# Altium PCB верхняя плата версия 1.PcbDoc
Units mm, origin at the board's own origin, x right, y up, seen from the top; angles counter-clockwise.
Board outline 57.07 x 52.6 mm, 4 copper layers (Top Layer 1, Top Layer, Bottom Layer, Bottom Layer 1), stack 0.603 mm thick; 105 components, 130 nets, 774 pads, 174 vias.
Unrouted connection lines stored in the file: 275.
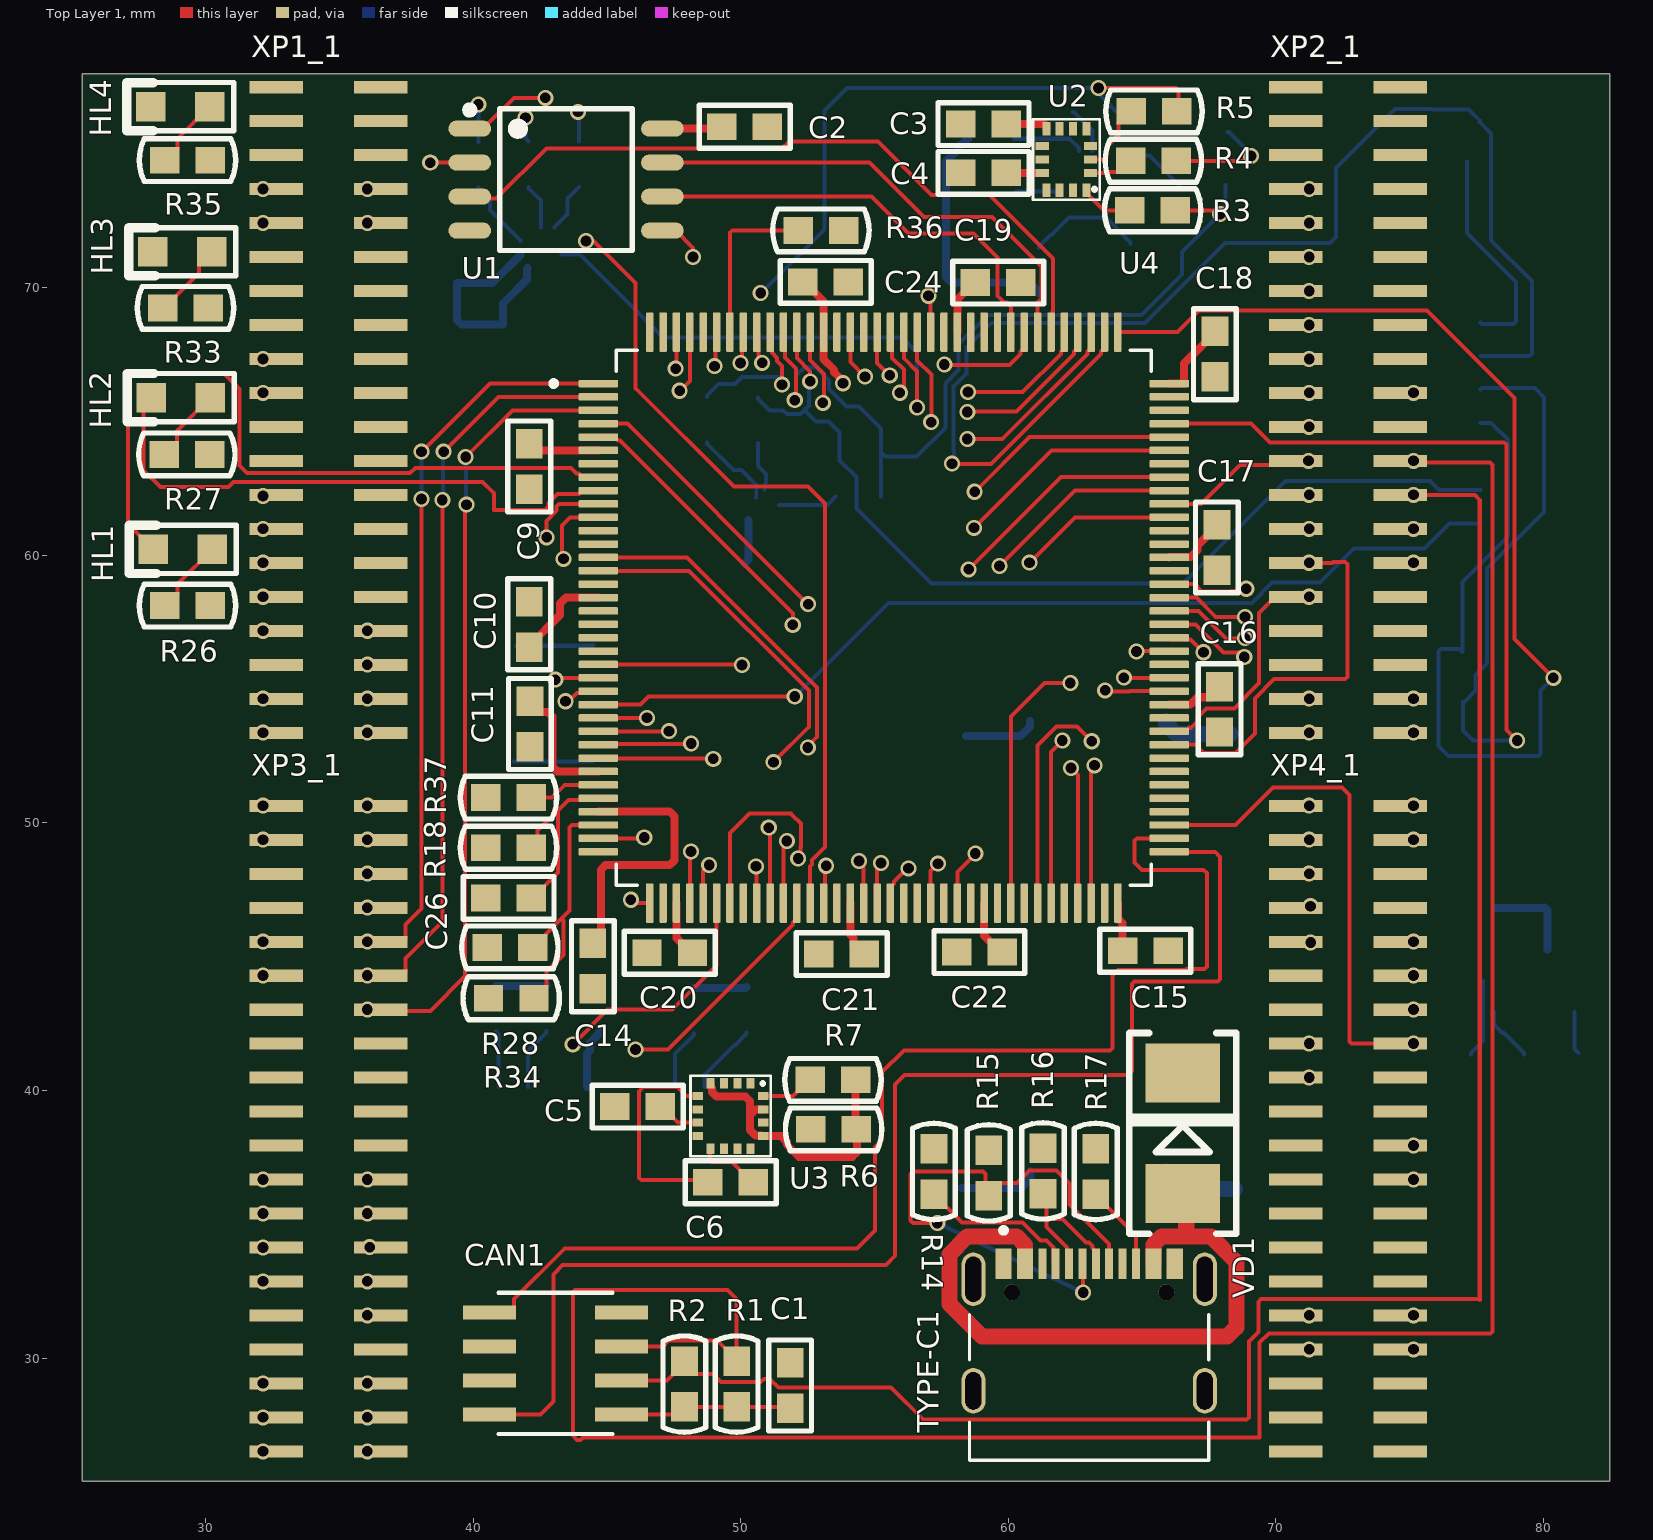
[diagram p0: Top Layer 1 view]
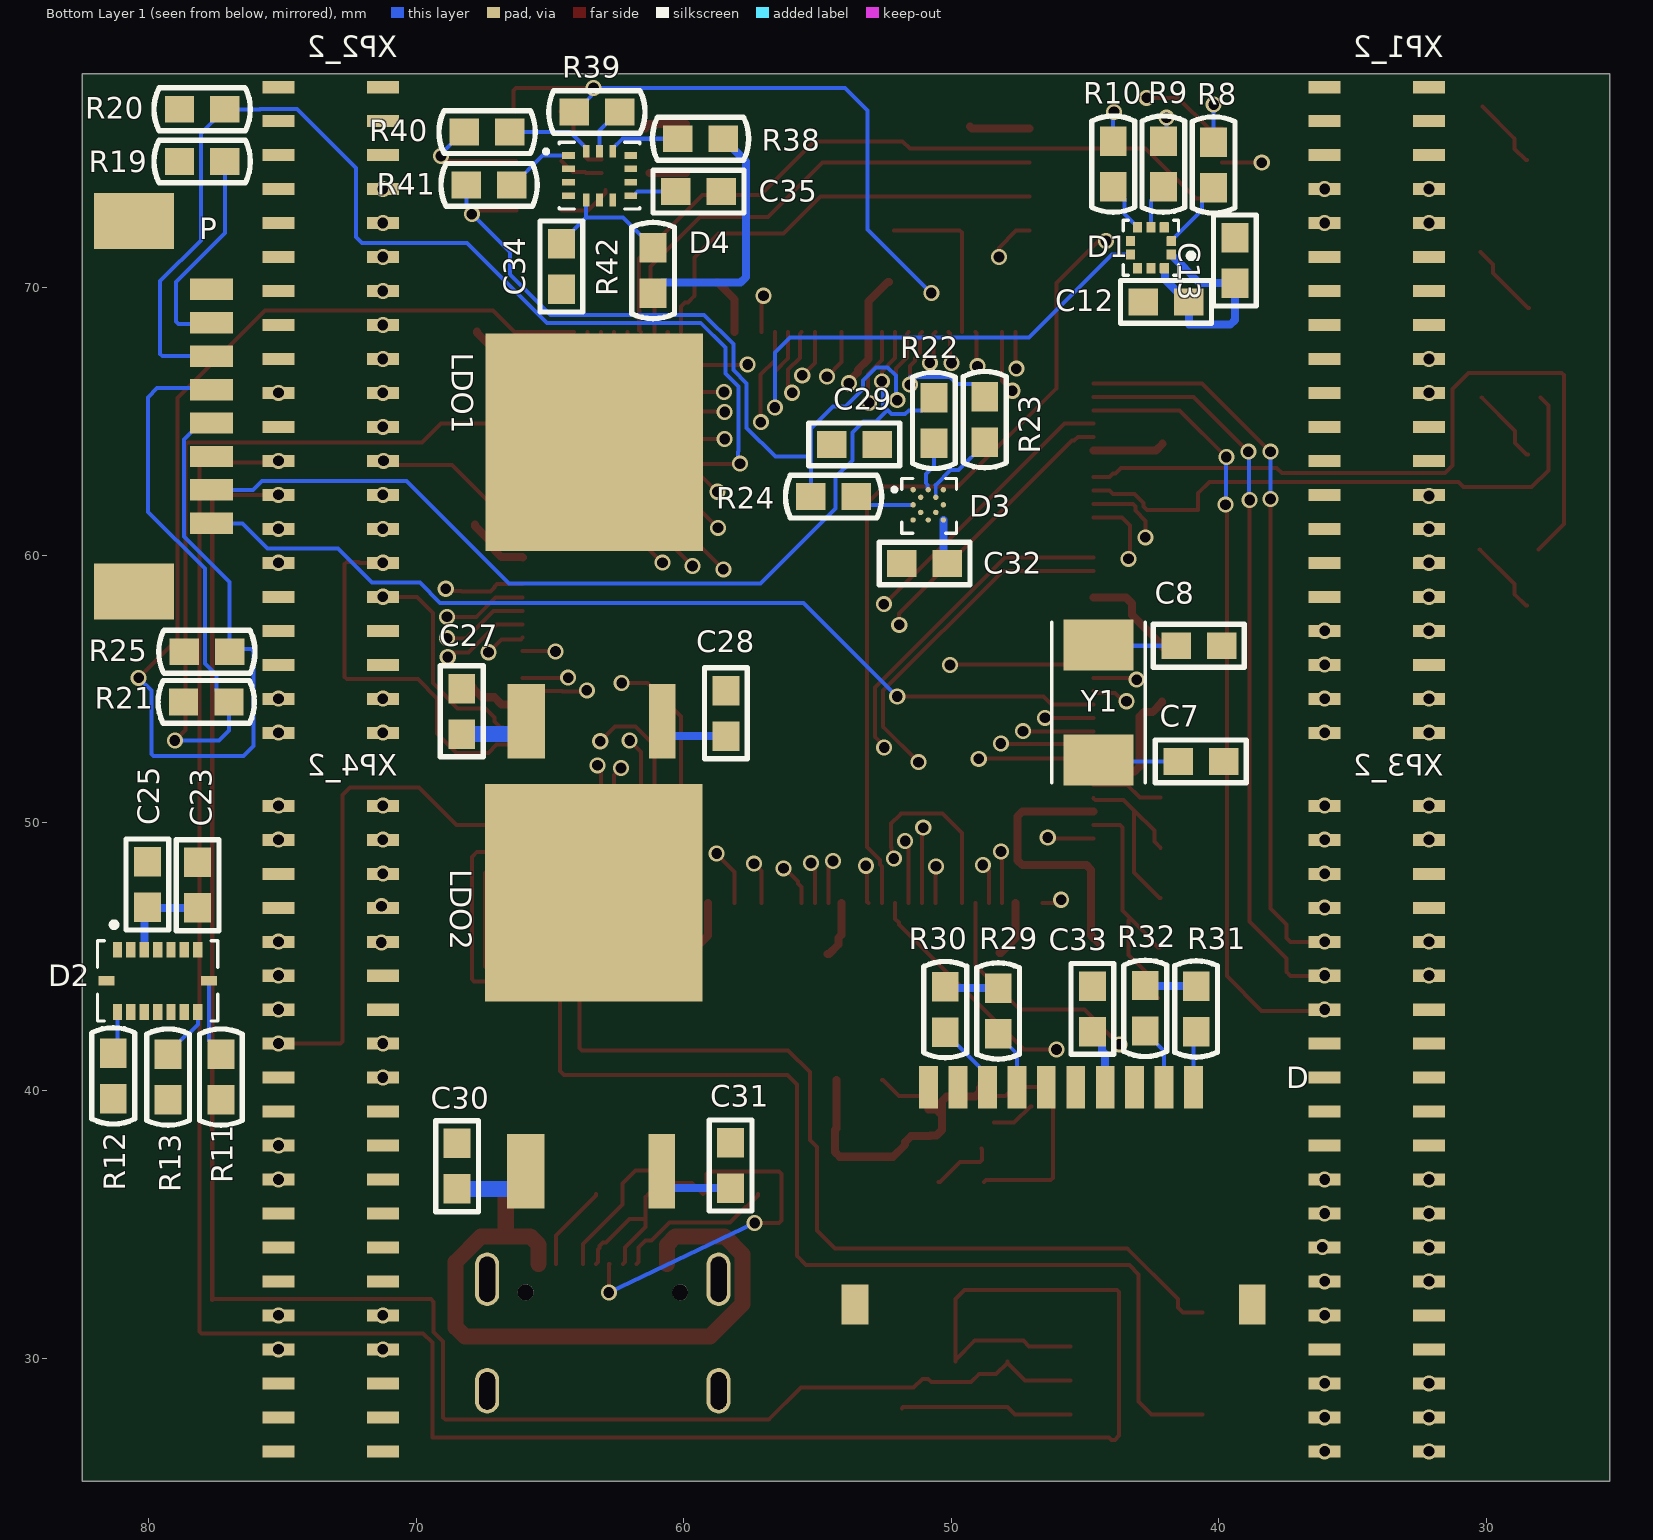
[diagram p1: Bottom Layer 1 view, seen from below]
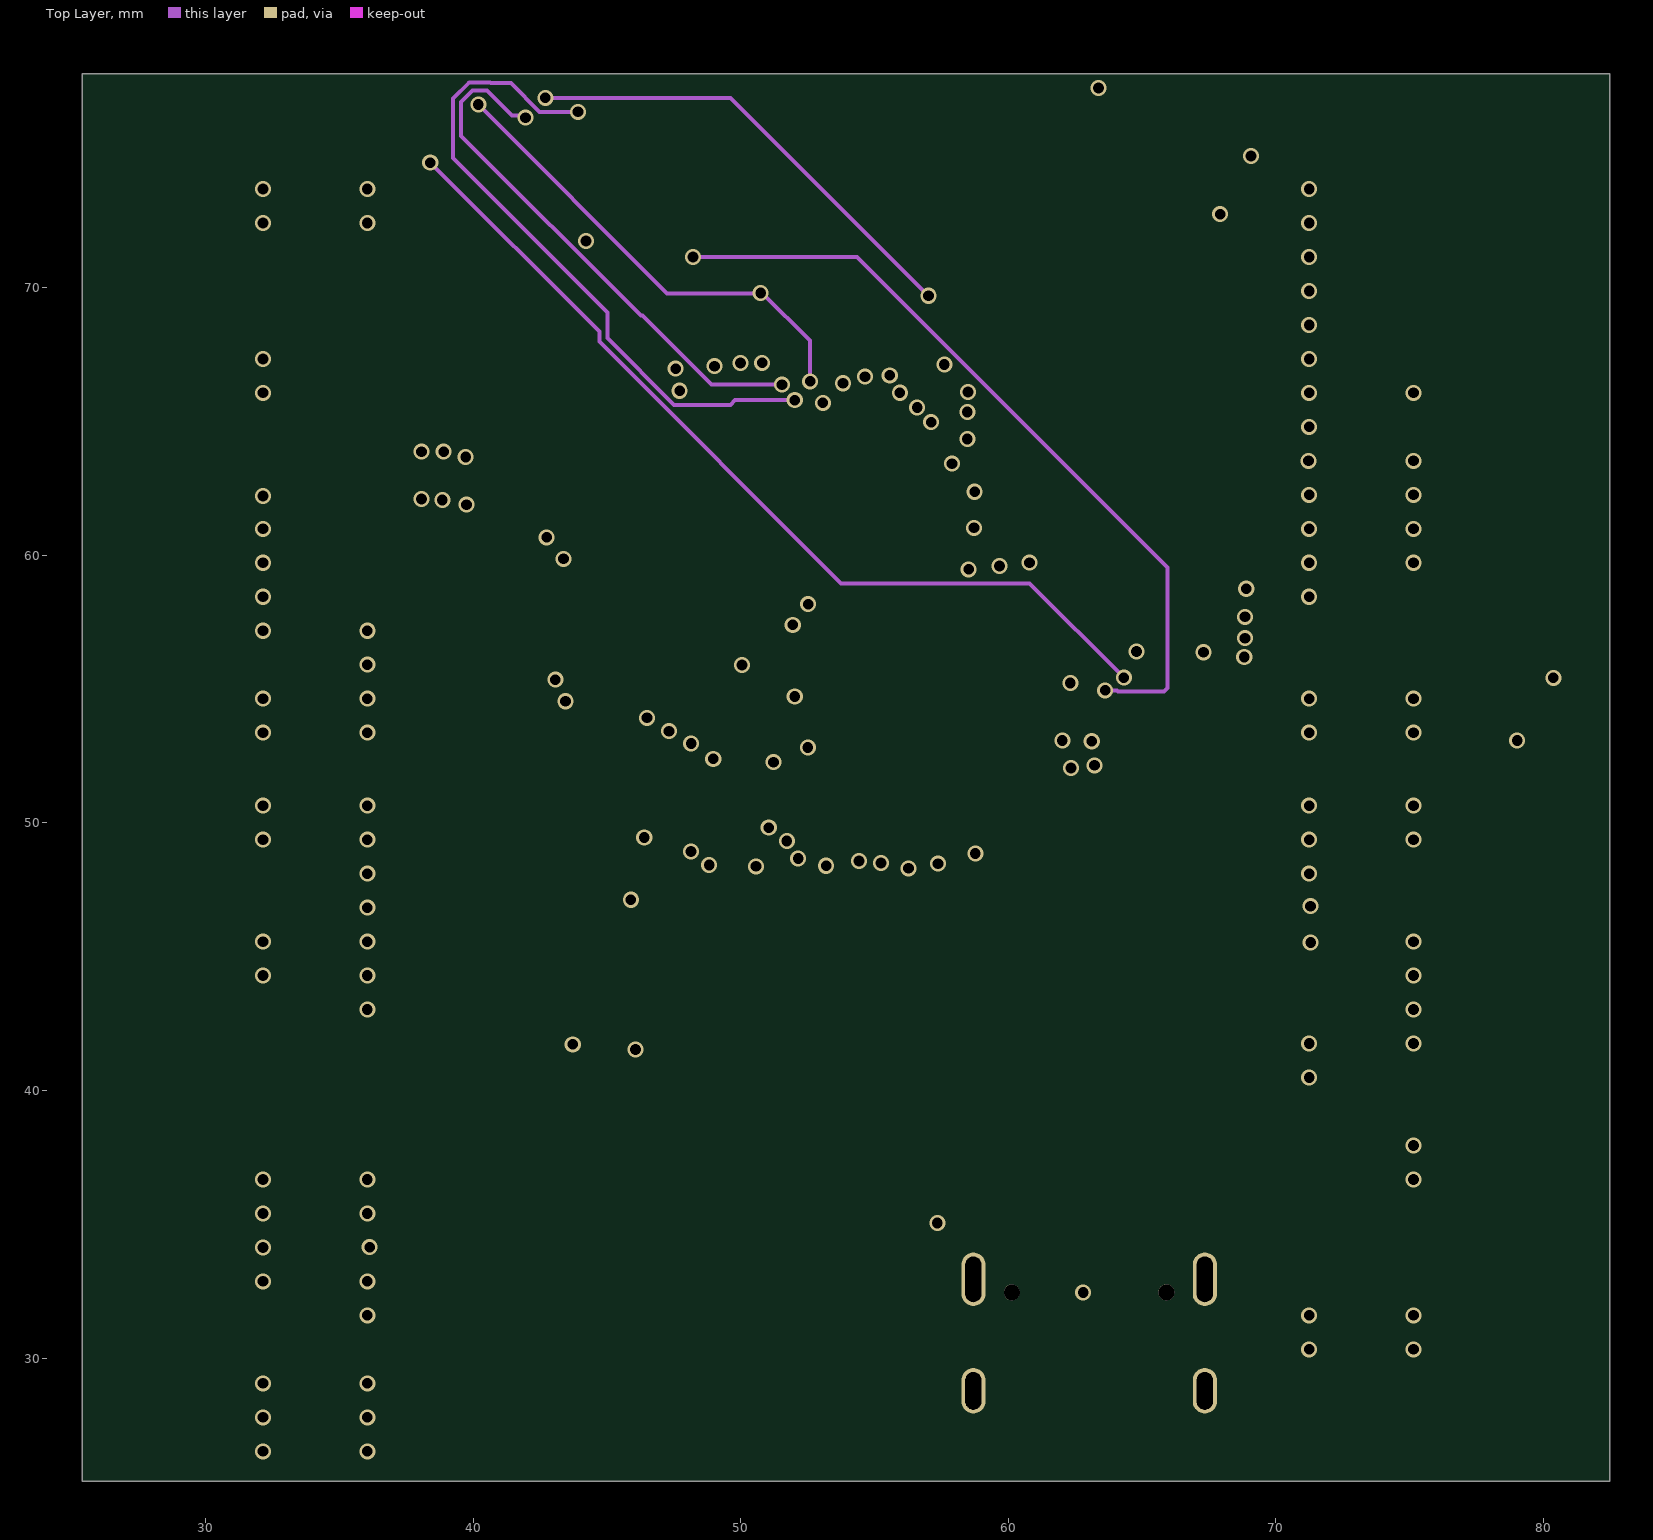
[diagram p2: Top Layer]
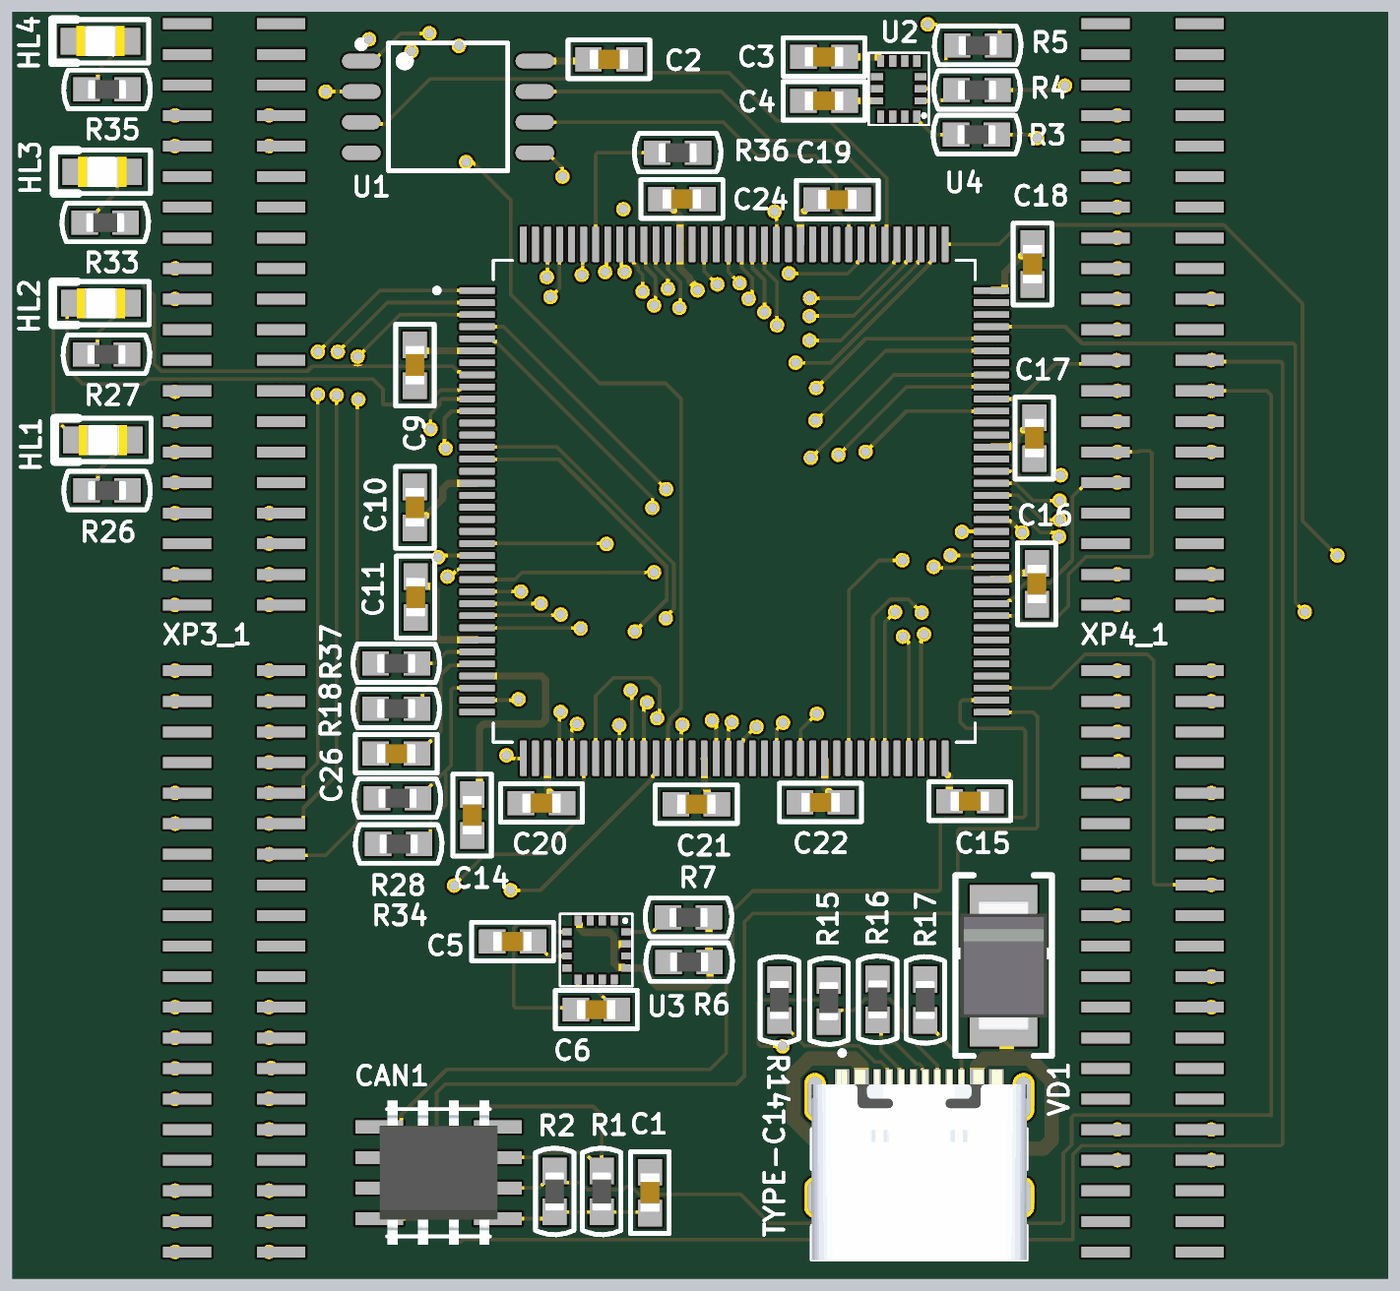
[diagram p3: 3D render of the assembled board from above, using the file's embedded part models]
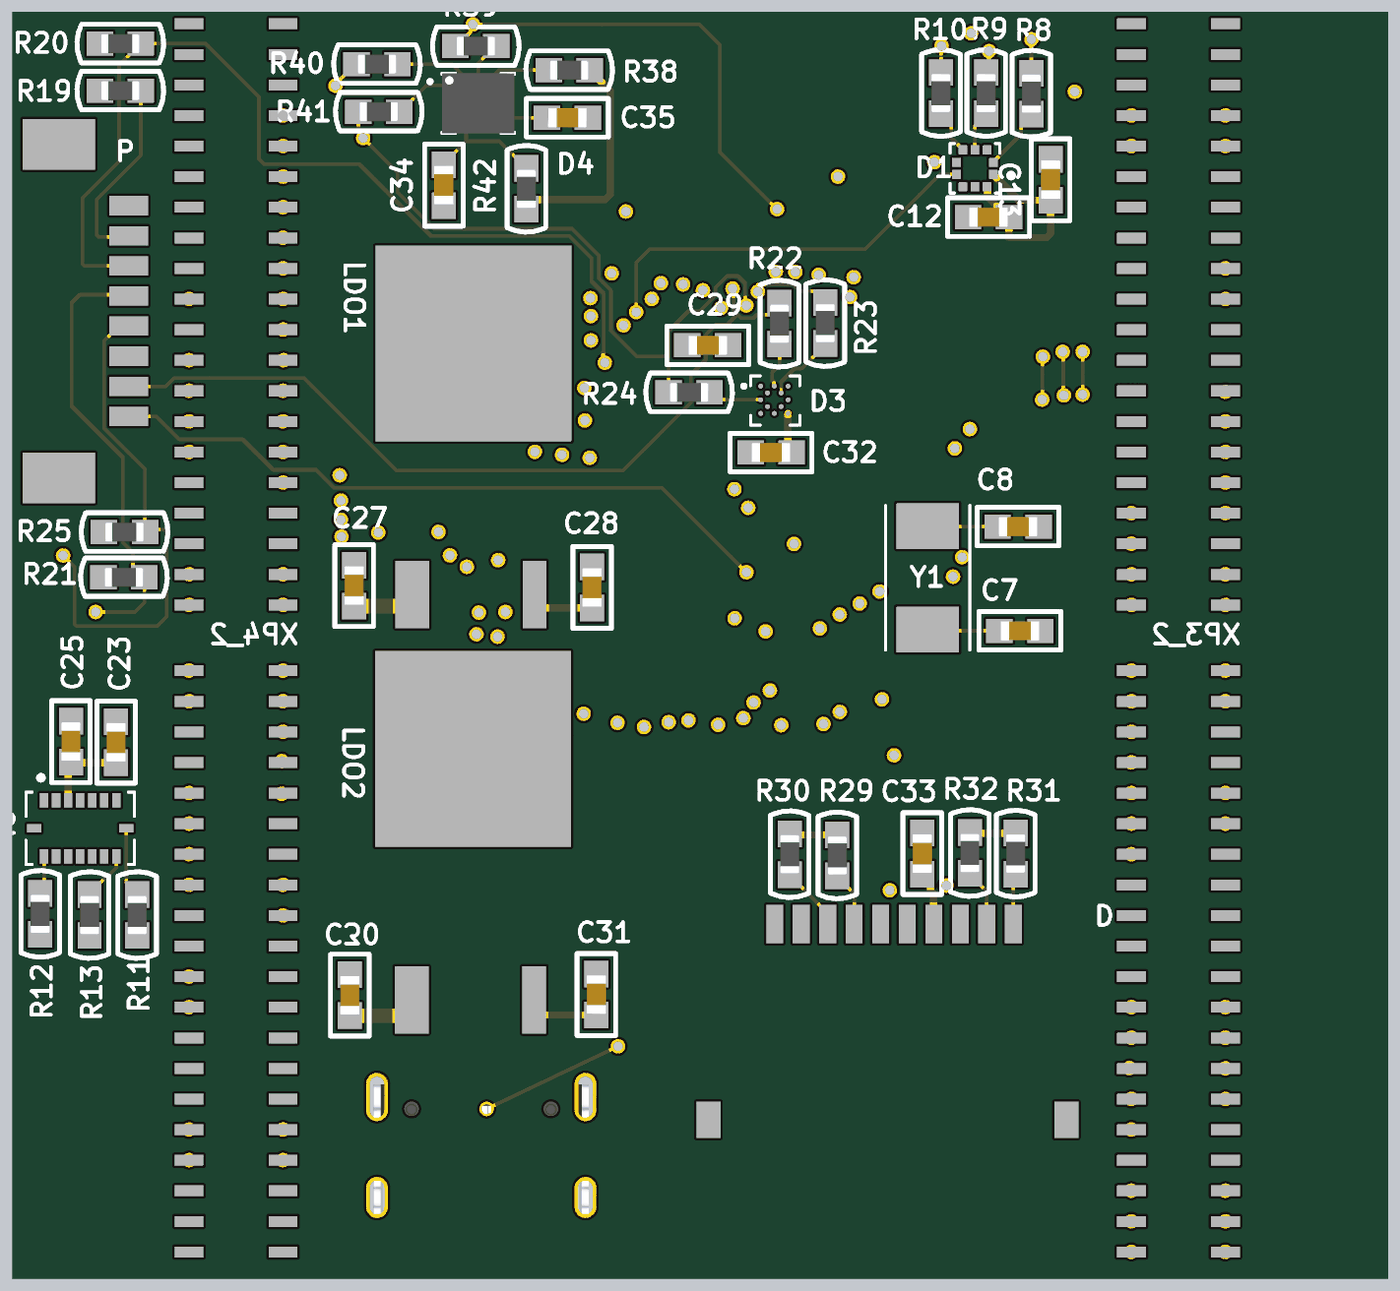
[diagram p4: 3D render of the assembled board from below, using the file's embedded part models]

## Layer stack, top to bottom
Top Solder: solder mask 0.0102, Solder Resist, Dk 3.5
Top Layer 1: signal copper 0.035
Dielectric 2: prepreg 0.0711, PP-006, Dk 4.1
Top Layer: signal copper 0.0356
Dielectric 1: dielectric 0.32, FR-4, Dk 4.8
Bottom Layer: signal copper 0.0356
Dielectric 3: prepreg 0.0711, PP-006, Dk 4.1
Bottom Layer 1: signal copper 0.035
Bottom Solder: solder mask 0.0102, Solder Resist, Dk 3.5

## Board outline
25.4,25.4 82.475,25.4 82.475,78 25.4,78

## Design rules (kind name [scope] priority, off if disabled: settings)
Clearance [All] p1: gap=0.15 ignorepadtopadclearanceinfootprint=FALSE except(0: Arc-Hole Track-Hole SMDPad-Hole THPad-Hole Via-Hole Fill-Hole Poly-Hole Region-Hole Text-Hole; 0.2: Arc-Region Track-Region SMDPad-Region THPad-Region Via-Region Fill-Region Poly-Region Region-Region)
PolygonConnect [All] p1: connectstyle=Direct reliefconductorwidth=0.254 reliefentries=4 polygonreliefangle="90 Angle" airgapwidth=0.254
RoutingVias [All] p1: holewidth=0.4 width=0.6 viastyle="Through Hole" minholewidth=0.4 minwidth=0.6 maxholewidth=0.4 maxwidth=0.6
SolderMaskExpansion [All] p1: expansion=0.102 istentingtop=FALSE
Width Width_5 [InNet('GND')] p1: maxlimit=0.6 minlimit=0.6 preferedwidth=0.6 minimp=50.000000 maximp=50.000000 favimp=50.000000
Width Width_4 [InNet('VCC')] p2: maxlimit=0.6 minlimit=0.6 preferedwidth=0.6 minimp=50.000000 maximp=50.000000 favimp=50.000000
Width Width_3 [InNet('5V')] p3: maxlimit=0.6 minlimit=0.5 preferedwidth=0.6 minimp=50.000000 maximp=50.000000 favimp=50.000000
Width Width_2 [InNet('3V3_SEN')] p4: maxlimit=0.3 minlimit=0.3 preferedwidth=0.3 minimp=50.000000 maximp=50.000000 favimp=50.000000
Width Width_1 [InNet('3V3')] p5: maxlimit=0.3 minlimit=0.3 preferedwidth=0.3 minimp=50.000000 maximp=50.000000 favimp=50.000000
Width [All] p6: maxlimit=0.15 minlimit=0.13 preferedwidth=0.15 minimp=50.000000 maximp=50.000000 favimp=50.000000
30 further rules are at their usual default settings.

## Components (designator, comment, footprint, x,y, rotation, side; value= is the part's Value field where it differs from the comment)
C1 "47 nF" C0603 51.85,28.975 r270 top
C2 "100 nF" C0603 50.15,76.025 r180 top
C3 "100 nF" C0603 59.075,76.125 r0 top
C4 "100 nF" C0603 59.075,74.3 r0 top
C5 "4.7 uF" C0603 46.15,39.4 r0 top
C6 "0.22 uF" C0603 49.625,36.575 r0 top
C7 "22 pF" C0603 40.675,52.3 r0 bottom
C8 "22 pF" C0603 40.75,56.625 r0 bottom
C9 "100 nF" C0603 42.1,63.325 r90 top
C10 "100 nF" C0603 42.1,57.425 r270 top
C11 "100 nF" C0603 42.125,53.7 r90 top
C12 "100 nF" C0603 41.975,69.475 r180 bottom
C13 "100 nF" C0603 39.4,71.025 r270 bottom
C14 "100 nF" C0603 44.475,44.65 r90 top
C15 "100 nF" C0603 65.125,45.225 r180 top
C16 "100 nF" C0603 67.9,54.25 r90 top
C17 "100 nF" C0603 67.8,60.3 r90 top
C18 "100 nF" C0603 67.725,67.525 r90 top
C19 "100 nF" C0603 59.625,70.2 r180 top
C20 "100 nF" C0603 47.35,45.15 r0 top
C21 "100 nF" C0603 53.775,45.1 r0 top
C22 "100 nF" C0603 58.925,45.175 r0 top
C23 "100 nF" C0603 78.175,47.675 r270 bottom
C24 "100 nF" C0603 53.175,70.225 r180 top
C25 "100 nF" C0603 80.05,47.7 r270 bottom
C26 "100 nF" C0603 41.325,47.2 r0 top
C27 "0.1 uF" C0603 68.3,54.175 r270 bottom
C28 "10 uF" C0603 58.425,54.1 r270 bottom
C29 "100 nF" C0603 53.625,64.15 r180 bottom
C30 "0.1 uF" C0603 68.475,37.175 r270 bottom
C31 "10 uF" C0603 58.25,37.2 r270 bottom
C32 "100 nF" C0603 51,59.7 r180 bottom
C33 "0.1 uF" C0603 44.725,43.05 r270 bottom
C34 "100 nF" C0603 64.575,70.8 r90 bottom
C35 "100 nF" C0603 59.45,73.6 r0 bottom
CAN1 "TJA1040T" SO-8_S 43.075,29.8 r0 top
D "D" GTFP08131Y2HR 45.8,32.8 r0 bottom
D1 "BMP388" PQFN50P200X200X80-10N 42.54,71.5 r0 bottom
D2 "BMI088" PQFN50P450X300X100-16N 79.665,44.1 r180 bottom
D3 "BMM150" XDCR_BMM150 50.828,61.857 r180 bottom
D4 "BMI270" XDCR_BMI270 63.15,74.2 r180 bottom
HL1 "" LD0805 29.15,60.225 r180 top
HL2 "" LD0805 29.075,65.9 r180 top
HL3 "" LD0805 29.125,71.35 r180 top
HL4 "" LD0805 29.05,76.775 r180 top
LDO1 "КФ1158Н" ТО-263 66.017,54.827 r180 bottom
LDO2 "КФ1158Н" ТО-263 66.034,38 r180 bottom
P "Header 1x8" "PicoBlade 8pin" 77.65,65.585 r270 bottom
R1 "60Om" R0603 49.85,29.025 r270 top
R2 "60 Om" R0603 47.9,29.025 r270 top
R3 "0" R0603 65.4,72.9 r0 top
R4 "0" R0603 65.425,74.75 r0 top
R5 "0" R0603 65.45,76.6 r0 top
R6 "2.2k" R0603 53.475,38.55 r0 top
R7 "2.2k" R0603 53.45,40.4 r0 top
R8 "0" R0603 40.2,74.6 r270 bottom
R9 "0" R0603 42.075,74.625 r270 bottom
R10 "0" R0603 43.95,74.625 r270 bottom
R11 "0" R0603 77.3,40.5 r90 bottom
R12 "0" R0603 81.325,40.55 r270 bottom
R13 "0" R0603 79.275,40.5 r90 bottom
R14 "5,1 кОм" R0603 57.225,36.975 r270 top
R15 "68" R0603 59.275,36.925 r90 top
R16 "68" R0603 61.3,37 r90 top
R17 "5,1 кОм" R0603 63.275,36.975 r90 top
R18 "47 Ом" R0603 41.325,49.075 r0 top
R19 "47 кОм" R0603 78,74.725 r0 bottom
R20 "47 кОм" R0603 78,76.675 r0 bottom
R21 "47 кОм" R0603 77.85,54.525 r0 bottom
R22 "0" R0603 50.65,65.05 r270 bottom
R23 "0" R0603 48.75,65.075 r270 bottom
R24 "0" R0603 54.4,62.2 r0 bottom
R25 "47 кОм" R0603 77.825,56.4 r0 bottom
R26 "220" R0603 29.325,58.125 r0 top
R27 "220" R0603 29.3,63.775 r0 top
R28 "0" R0603 41.375,45.35 r180 top
R29 "47 кОм" R0603 48.25,42.975 r270 bottom
R30 "47 кОм" R0603 50.225,43.025 r270 bottom
R31 "47 кОм" R0603 40.85,43.05 r270 bottom
R32 "47 кОм" R0603 42.75,43.075 r270 bottom
R33 "220" R0603 29.25,69.25 r0 top
R34 "0" R0603 41.425,43.45 r0 top
R35 "220" R0603 29.325,74.775 r0 top
R36 "10 kOm" R0603 53,72.15 r0 top
R37 "0" R0603 41.325,50.95 r180 top
R38 "10 кОм" R0603 59.375,75.575 r180 bottom
R39 "0" R0603 63.25,76.575 r180 bottom
R40 "0" R0603 67.35,75.825 r180 bottom
R41 "0" R0603 67.275,73.85 r180 bottom
R42 "0" R0603 61.15,70.65 r270 bottom
TYPE-C1 "TYPE-C-31-M-12" HRO_TYPE-C-31-M-12 63.025,28.775 r0 top
U1 "W25Q128FVSIG" SOIC127P790X216-8N 43.475,74.05 r0 top
U2 "QMI8658" QMI8658 62.125,74.725 r270 top
U3 "QMC5883L" QMC5883L 49.625,39.125 r0 top
U4 "K1921BK01T2" QFP50P2200X2200X160-144N 55.35,57.675 r0 top
VD1 "" DO-214AA 66.525,38.4 r90 top
XP1_1 "PLLD-1.27-40S" "Headr 2x20 male" 34.597,65.649 r0 top locked
XP1_2 "PLLD-1.27-40S" "Headr 2x20 Female" 33.97,66.538 r0 bottom locked
XP2_1 "PLLD-1.27-40S" "Headr 2x20 male" 72.697,65.649 r0 top locked
XP2_2 "PLLD-1.27-40S" "Headr 2x20 Female" 73.07,66.538 r0 bottom locked
XP3_1 "PLLD-1.27-40S" "Headr 2x20 male" 34.597,38.789 r0 top locked
XP3_2 "PLLD-1.27-40S" "Headr 2x20 Female" 33.97,39.678 r0 bottom locked
XP4_1 "PLLD-1.27-40S" "Headr 2x20 male" 72.697,38.789 r0 top locked
XP4_2 "PLLD-1.27-40S" "Headr 2x20 Female" 73.07,39.678 r0 bottom locked
Y1 "8 мгц" XTAL_ABM7-8.000MHZ-8-R80-D2Y-T 44.5,54.5 r270 bottom

## Footprints (in the part's own frame and the unit in brackets; to place one, negate y for a bottom-side part, rotate by r counter-clockwise, add the part's x,y. Pads: shape width x height; smd on the part's side, far side on the other; paste and mask are expansions set on the pad)
C0603 [mm] "1608M"
  rect 1.1x1 smd: 1(-0.85,0) 2(0.85,0)
  silkscreen extent -1.7,-0.8 1.7,0.8, body extent -0.8,-0.4 0.8,0.4, height 0.91
DO-214AA [mm] "(SMB) Low profile package"
  rect 2.2x2.8 smd: 1(-2.25,0) 2(2.25,0)
  silkscreen extent -3.75,-2 3.75,2, body extent -2.7,-1.8 2.7,1.8, height 2.3
GTFP08131Y2HR [mm]
  rect 0.7x1.6 smd: 1(-4.85,-7.325) 2(-3.75,-7.325) 3(-2.65,-7.325) 4(-1.55,-7.325) 5(-0.45,-7.325) 6(0.65,-7.325) 7(1.75,-7.325) 8(2.85,-7.325) 9(3.95,-7.325) CD(5.05,-7.325)
  rect 1x1.5 smd: S1(-7.05,0.8) S2(7.8,0.8)
"Headr 2x20 Female" [mm]
  rect 1.2x0.45 smd: 1(-1.82,-10.962) 2(2.08,-10.962) 3(-1.82,-9.692) 4(2.08,-9.692) 5(-1.82,-8.422) 6(2.08,-8.422) 7(-1.82,-7.152) 8(2.08,-7.152) 9(-1.82,-5.882) 10(2.08,-5.882) 11(-1.82,-4.612) 12(2.08,-4.612) 13(-1.82,-3.342) 14(2.08,-3.342) 15(-1.82,-2.072) 16(2.08,-2.072) 17(-1.82,-0.802) 18(2.08,-0.802) 19(-1.82,0.468) 20(2.08,0.468) 21(-1.82,1.738) 22(2.08,1.738) 23(-1.82,3.008) 24(2.08,3.008) 25(-1.82,4.278) 26(2.08,4.278) 27(-1.82,5.548) 28(2.08,5.548) 29(-1.82,6.818) 30(2.08,6.818) 31(-1.82,8.088) 32(2.08,8.088) 33(-1.82,9.358) 34(2.08,9.358) 35(-1.82,10.628) 36(2.08,10.628) 37(-1.82,11.898) 38(2.08,11.898) 39(-1.82,13.168) 40(2.08,13.168)
"Headr 2x20 male" [mm]
  rect 2x0.45 smd: 1(-1.947,11.851) 2(1.953,11.851) 3(-1.947,10.581) 4(1.953,10.581) 5(-1.947,9.311) 6(1.953,9.311) 7(-1.947,8.041) 8(1.953,8.041) 9(-1.947,6.771) 10(1.953,6.771) 11(-1.947,5.501) 12(1.953,5.501) 13(-1.947,4.231) 14(1.953,4.231) 15(-1.947,2.961) 16(1.953,2.961) 17(-1.947,1.691) 18(1.953,1.691) 19(-1.947,0.421) 20(1.953,0.421) 21(-1.947,-0.849) 22(1.953,-0.849) 23(-1.947,-2.119) 24(1.953,-2.119) 25(-1.947,-3.389) 26(1.953,-3.389) 27(-1.947,-4.659) 28(1.953,-4.659) 29(-1.947,-5.929) 30(1.953,-5.929) 31(-1.947,-7.199) 32(1.953,-7.199) 33(-1.947,-8.469) 34(1.953,-8.469) 35(-1.947,-9.739) 36(1.953,-9.739) 37(-1.947,-11.009) 38(1.953,-11.009) 39(-1.947,-12.279) 40(1.953,-12.279)
HRO_TYPE-C-31-M-12 [mm]
  rect 0.6x1.14 smd mask+0.05: A1_B12(-3.2,4.75) A4_B9(-2.4,4.75) B1_A12(3.2,4.75) B4_A9(2.4,4.75)
  rect 0.3x1.14 smd mask+0.05: A5(-1.25,4.75) A6(-0.25,4.75) A7(0.25,4.75) A8(1.25,4.75) B5(1.75,4.75) B6(0.75,4.75) B7(-0.75,4.75) B8(-1.75,4.75)
  oval 0.9x2 hole 0.6 slot 1.7 at 90 deg: S1(-4.325,4.17) S2(4.325,4.17)
  oval 0.9x1.7 hole 0.6 slot 1.4 at 90 deg: S3(-4.325,0) S4(4.325,0)
  round 0.6 hole 0.6 unplated: ""(-2.89,3.68) ""(2.89,3.68)
  silkscreen extent -4.47,-2.6 4.47,6.1, body extent -4.47,-2.6 4.47,5.31, height 3.31
LD0805 [mm]
  rect 1.1x1.1 smd: 1(-1.1,0) 2(1.1,0)
  silkscreen extent -2,-0.9 2,0.9, body extent -1,-0.62 1,0.63, height 0.73
"PicoBlade 8pin" [mm]
  rect 0.8x1.6 smd: 1(-4.365,0) 2(-3.115,0) 3(-1.865,0) 4(-0.615,0) 5(0.635,0) 6(1.885,0) 7(3.135,0) 8(4.385,0)
  rect 2.1x3 smd: S(-6.915,-2.9) S(6.935,-2.9)
PQFN50P200X200X80-10N [mm]
  rrect9% 0.35x0.38 smd: 1(-0.765,0.25) 2(-0.765,-0.25) 3(-0.5,-0.765) 4(0,-0.765) 5(0.5,-0.765) 6(0.765,-0.25) 7(0.765,0.25) 8(0.5,0.765) 9(0,0.765) 10(-0.5,0.765)
  silkscreen extent -1.6,-1.03 1.03,1.03
PQFN50P450X300X100-16N [mm]
  rect 0.35x0.59 smd: 1(-1.5,1.165) 2(-1,1.165) 3(-0.5,1.165) 4(0,1.165) 5(0.5,1.165) 6(1,1.165) 7(1.5,1.165) 9(1.5,-1.165) 10(1,-1.165) 11(0.5,-1.165) 12(0,-1.165) 13(-0.5,-1.165) 14(-1,-1.165) 15(-1.5,-1.165)
  rect 0.59x0.35 smd: 8(1.915,0) 16(-1.915,0)
  silkscreen extent -2.25,-1.5 2.25,2.2
QFP50P2200X2200X160-144N [mm]
  rrect25% 1.47x0.28 smd: 1(-10.67,8.75) 2(-10.67,8.25) 3(-10.67,7.75) 4(-10.67,7.25) 5(-10.67,6.75) 6(-10.67,6.25) 7(-10.67,5.75) 8(-10.67,5.25) 9(-10.67,4.75) 10(-10.67,4.25) 11(-10.67,3.75) 12(-10.67,3.25) 13(-10.67,2.75) 14(-10.67,2.25) 15(-10.67,1.75) 16(-10.67,1.25) 17(-10.67,0.75) 18(-10.67,0.25) 19(-10.67,-0.25) 20(-10.67,-0.75) 21(-10.67,-1.25) 22(-10.67,-1.75) 23(-10.67,-2.25) 24(-10.67,-2.75) 25(-10.67,-3.25) 26(-10.67,-3.75) 27(-10.67,-4.25) 28(-10.67,-4.75) 29(-10.67,-5.25) 30(-10.67,-5.75) 31(-10.67,-6.25) 32(-10.67,-6.75) 33(-10.67,-7.25) 34(-10.67,-7.75) 35(-10.67,-8.25) 36(-10.67,-8.75) 73(10.67,-8.75) 74(10.67,-8.25) 75(10.67,-7.75) 76(10.67,-7.25) 77(10.67,-6.75) 78(10.67,-6.25) 79(10.67,-5.75) 80(10.67,-5.25) 81(10.67,-4.75) 82(10.67,-4.25) 83(10.67,-3.75) 84(10.67,-3.25) 85(10.67,-2.75) 86(10.67,-2.25) 87(10.67,-1.75) 88(10.67,-1.25) 89(10.67,-0.75) 90(10.67,-0.25) 91(10.67,0.25) 92(10.67,0.75) 93(10.67,1.25) 94(10.67,1.75) 95(10.67,2.25) 96(10.67,2.75) 97(10.67,3.25) 98(10.67,3.75) 99(10.67,4.25) 100(10.67,4.75) 101(10.67,5.25) 102(10.67,5.75) 103(10.67,6.25) 104(10.67,6.75) 105(10.67,7.25) 106(10.67,7.75) 107(10.67,8.25) 108(10.67,8.75)
  rrect25% 0.28x1.47 smd: 37(-8.75,-10.67) 38(-8.25,-10.67) 39(-7.75,-10.67) 40(-7.25,-10.67) 41(-6.75,-10.67) 42(-6.25,-10.67) 43(-5.75,-10.67) 44(-5.25,-10.67) 45(-4.75,-10.67) 46(-4.25,-10.67) 47(-3.75,-10.67) 48(-3.25,-10.67) 49(-2.75,-10.67) 50(-2.25,-10.67) 51(-1.75,-10.67) 52(-1.25,-10.67) 53(-0.75,-10.67) 54(-0.25,-10.67) 55(0.25,-10.67) 56(0.75,-10.67) 57(1.25,-10.67) 58(1.75,-10.67) 59(2.25,-10.67) 60(2.75,-10.67) 61(3.25,-10.67) 62(3.75,-10.67) 63(4.25,-10.67) 64(4.75,-10.67) 65(5.25,-10.67) 66(5.75,-10.67) 67(6.25,-10.67) 68(6.75,-10.67) 69(7.25,-10.67) 70(7.75,-10.67) 71(8.25,-10.67) 72(8.75,-10.67) 109(8.75,10.67) 110(8.25,10.67) 111(7.75,10.67) 112(7.25,10.67) 113(6.75,10.67) 114(6.25,10.67) 115(5.75,10.67) 116(5.25,10.67) 117(4.75,10.67) 118(4.25,10.67) 119(3.75,10.67) 120(3.25,10.67) 121(2.75,10.67) 122(2.25,10.67) 123(1.75,10.67) 124(1.25,10.67) 125(0.75,10.67) 126(0.25,10.67) 127(-0.25,10.67) 128(-0.75,10.67) 129(-1.25,10.67) 130(-1.75,10.67) 131(-2.25,10.67) 132(-2.75,10.67) 133(-3.25,10.67) 134(-3.75,10.67) 135(-4.25,10.67) 136(-4.75,10.67) 137(-5.25,10.67) 138(-5.75,10.67) 139(-6.25,10.67) 140(-6.75,10.67) 141(-7.25,10.67) 142(-7.75,10.67) 143(-8.25,10.67) 144(-8.75,10.67)
  silkscreen extent -12.44,-10 10,10
QMC5883L [mm]
  rect 0.4x0.3 smd: 1(1.225,0.675) 2(1.225,0.175) 3(1.225,-0.325) 4(1.225,-0.825) 9(-1.225,-0.825) 10(-1.225,-0.325) 11(-1.225,0.175) 12(-1.225,0.675)
  rect 0.3x0.4 smd: 5(0.75,-1.3) 6(0.25,-1.3) 7(-0.25,-1.3) 8(-0.75,-1.3) 13(-0.75,1.15) 14(-0.25,1.15) 15(0.25,1.15) 16(0.75,1.15)
  silkscreen extent -1.5,-1.58 1.5,1.42
QMI8658 [mm]
  rect 0.5x0.3 smd: 1(1.075,0.8) 2(1.075,0.3) 3(1.075,-0.2) 4(1.075,-0.7) 8(-1.225,-0.7) 9(-1.225,-0.2) 10(-1.225,0.3) 11(-1.225,0.8)
  rect 0.3x0.5 smd: 5(0.425,-0.85) 6(-0.075,-0.85) 7(-0.575,-0.85) 12(-0.575,0.95) 13(-0.075,0.95) 14(0.425,0.95)
  silkscreen extent -1.57,-1.2 1.43,1.3
R0603 [mm] "1608M"
  rect 1.1x1 smd: 1(-0.85,0) 2(0.85,0)
  silkscreen extent -1.8,-0.8 1.8,0.8, body extent -0.8,-0.4 0.8,0.4, height 0.38
SO-8_S [mil]
  rect 78x21 smd: 1(-97,75) 2(-97,25) 3(-97,-25) 4(-97,-75) 5(97,-75) 6(97,-25) 7(97,25) 8(97,75)
  silkscreen extent -84,-104 84,104, body extent -96,-118 96,118, height 69
SOIC127P790X216-8N [mm]
  oval 1.6x0.6 smd: 1(-3.6,1.905) 2(-3.6,0.635) 3(-3.6,-0.635) 4(-3.6,-1.905) 5(3.6,-1.905) 6(3.6,-0.635) 7(3.6,0.635) 8(3.6,1.905)
  silkscreen extent -3.82,-2.65 2.47,2.82
XDCR_BMI270 [mm]
  rect 0.475x0.25 smd: 1(-1.162,0.75) 2(-1.162,0.25) 3(-1.162,-0.25) 4(-1.162,-0.75) 8(1.162,-0.75) 9(1.162,-0.25) 10(1.162,0.25) 11(1.162,0.75)
  rect 0.25x0.475 smd: 5(-0.5,-0.913) 6(0,-0.913) 7(0.5,-0.913) 12(0.5,0.913) 13(0,0.913) 14(-0.5,0.913)
  silkscreen extent -2.08,-1.25 1.5,1.25, body extent -1.5,-1.25 1.5,1.25, height 0.87
XDCR_BMM150 [mm]
  round 0.2 smd: A1(-0.601,0.601) A3(-0.035,0.601) A5(0.531,0.601) B2(-0.318,0.318) B4(0.248,0.318) C1(-0.601,0.035) C5(0.531,0.035) D2(-0.318,-0.248) D4(0.248,-0.248) E1(-0.601,-0.531) E3(-0.035,-0.531) E5(0.531,-0.531)
  silkscreen extent -1.38,-1.02 1.02,1.02
XTAL_ABM7-8.000MHZ-8-R80-D2Y-T [mm]
  rect 1.9x2.6 smd: 1(-2.15,0) 2(2.15,0)
  silkscreen extent -3,-1.75 3,1.75
ТО-263 [mm]
  rect 1.4x2.79 smd: 1(0.127,-1.022)
  rect 8.13x8.13 smd: 2(2.667,9.398)
  rect 0.99x2.79 smd: 3(5.207,-1.022)

## Part data
C1 C2 C3 C4 C5 C6 C7 C8 C9 C10 C11 C12 C13 C14 C15 C16 C17 C18 C19 C20 C21 C22 C23 C24 C25 C26 C27 C28 C29 C30 C31 C32 C33 C34 C35: library part Capacitor, Published=18.05.2010, Publisher="Andrew Danich", Type=Конденсатор
D: library part GTFP08131Y2HR
HL1 HL2 HL3 HL4: library part Led-1, Published=03.12.2013, Publisher="Andrew Danich", Type="Индикатор единичный"
R1 R2 R3 R4 R5 R6 R7 R8 R9 R10 R11 R12 R13 R14 R15 R16 R17 R18 R19 R20 R21 R22 R23 R24 R25 R26 R27 R28 R29 R30 R31 R32 R33 R34 R35 R36 R37 R38 R39 R40 R41 R42: library part Resistor, Published=24.03.2010, Publisher="Andrew Danich", Type=Резистор
VD1: library part Schottky
Y1: library part ABM7-8.000MHZ-8-R80-D2Y-T, "Crystal 22.1184MHz Ã‚Â±20ppm (Tol) Ã‚Â±30ppm (Stability) 18pF FUND 50Ohm 2-Pin Mini-CSMD T/R", Package=None, Availability=Unavailable, MP=ABM7-8.000MHZ-8-R80-D2Y-T, Price=None

## Via types
v1: diameter 0.6, hole 0.4, Top Layer 1 to Bottom Layer 1, 174 vias

## Nets (pads, with @x,y where several pads share a name; then routed paths per layer and width w, separated by ;. In a path a pad name is that pad's centre, name@x,y a point inside that pad or via, vN(x,y) a via of type N, cw(c..) or ccw(c..) an arc to the next point about the centre after c; other vN are vias at no path point)
3V3: C2.2 C9.2 C10.2 C11.2 C14.2 C15.2 C16.2 C17.2 C18.2 C19.2 C20.2 C21.2 C22.2 C24.2 C28.2 C33.2 D.4 LDO1.3 P.1 R18.1 R19.2 R20.2 R21.2 R26.2 R27.2 R28.2 R29.1 R30.1 R31.1 R32.1 R33.2 U1.8 U4.6 U4.17 U4.30 U4.33 U4.39 U4.52 U4.62 U4.72 U4.84 U4.95 U4.108 U4.121 U4.131 U4.144 XP1_1.9 XP1_1.10 XP1_2.9 XP1_2.10 XP4_1.31 XP4_1.32 XP4_2.31 XP4_2.32 | length 55
  Top Layer 1 w0.3: C10.2 42.1,56.625 43.25,57.775 43.25,58.199 43.476,58.425 U4.17 ; C9.2 42.35,63.925 U4.6 ; C11.2 42.125,54.5 42.475,54.15 42.799,54.15 42.975,53.974 42.975,52.101 43.151,51.925 U4.30 ; C14.2 44.775,45.8 44.775,48.25 44.951,48.426 47.349,48.426 47.525,48.601 47.525,50.249 47.349,50.425 U4.33 ; U1.8 49.23,75.955 C2.2 ; U4.39 47.6,45.7 48.15,45.15 C20.2 ; C24.2 52.375,70.225 53.1,69.5 U4.131 53.1,67.336 53.498,66.938 53.498,66.848 53.828,66.518 v1(53.828,66.436) ; U4.52 54.11,46.995 54.11,45.82 54.225,45.705 54.225,45.45 54.575,45.1 C21.2 ; U4.121 58.1,69.575 58.725,70.2 C19.2 ; U4.62 59.1,45.8 59.725,45.175 C22.2 ; U4.72 64.1,46.43 64.275,46.255 C15.2 ; U4.84 66.03,54.435 66.809,54.435 67.074,54.7 67.55,54.7 67.9,55.05 C16.2 ; U4.95 66.03,59.935 66.809,59.935 67.071,60.197 67.071,60.371 67.8,61.1 C17.2 ; U4.108 66.56,66.425 66.57,66.435 66.57,67.17 67.725,68.325 C18.2
  Bottom Layer 1 w0.3: R31.1 42.725,43.9 R32.1 ; D.4 44.25,41.375 44.375,41.5 44.375,41.8 44.725,42.15 C33.2 ; R29.1 50.175,43.825 R30.1 ; C28.2 60.465,53.25 60.81,53.595 LDO1.3
  other v1: 71.248,31.596 75.148,31.596 32.148,72.426 36.048,72.426
3V3_SEN: C3.2 C4.2 C12.2 C13.2 C23.2 C25.2 C29.2 C31.2 C32.2 D1.1 D1.10 D2.3 D2.11 D3.B2 D3.E5 LDO2.3 R6.2 R7.2 R35.2 R38.2 R42.2 U2.5 U2.8 U3.2 U3.4 U3.13 | length 39.8
  Top Layer 1 w0.3: U3.13 48.875,40.15 48.925,40.1 48.925,39.951 49.101,39.775 50.174,39.775 50.35,39.599 50.35,39.3 ; U3.2 50.576,39.3 50.463,39.187 50.35,39.3 ; R7.2 54.3,38.575 R6.2 54.35,38.525 54.35,37.701 54.174,37.525 52.176,37.525 51.725,37.975 51.725,38.075 51.5,38.3 U3.4 50.8,38.3 50.775,38.325 50.551,38.325 50.35,38.526 50.35,39.074 50.35,39.3 ; C4.2 61.175,74.3 U2.5 ; C3.2 61.35,76.125 61.425,76.05 U2.8
  Bottom Layer 1 w0.3: D1.1 41.775,71.235 40.715,70.175 C13.2 39.4,68.801 39.576,68.625 41.124,68.625 41.124,69.424 42.015,70.315 42.015,70.71 D1.10 ; C32.2 50.297,59.848 D3.E5 ; C31.2 60.482,36.35 60.827,36.695 LDO2.3 ; R38.2 58.475,75.575 58.125,75.225 58.125,75.175 57.675,74.725 57.675,70.401 57.876,70.2 60.8,70.2 61.15,69.85 R42.2 ; C23.2 80.025,46.825 C25.2 80.165,46.735 D2.3
4V2: XP1_1.11 XP1_1.12 XP1_1.13 XP1_1.14 XP1_2.11 XP1_2.12 XP1_2.13 XP1_2.14 XP4_1.27 XP4_1.28 XP4_1.29 XP4_1.30 XP4_2.27 XP4_2.28 XP4_2.29 XP4_2.30
5V: C27.2 C30.2 CAN1.3 LDO1.1 LDO2.1 TYPE-C1.A4_B9 TYPE-C1.B4_A9 VD1.1 VD1.2 XP1_1.7 XP1_1.8 XP1_2.7 XP1_2.8 XP4_1.33 XP4_1.34 XP4_2.33 XP4_2.34 | length 31.2
  Top Layer 1 w0.6: TYPE-C1.A4_B9 60.625,34.231 60.311,34.545 58.477,34.545 57.8,33.868 57.8,32.022 59.022,30.8 68.175,30.8 68.526,31.151 68.526,33.591 67.573,34.545 66.656,34.545 ; TYPE-C1.B4_A9 65.425,34.231 65.739,34.545 66.656,34.545 ; VD1.1 66.656,36.019 66.656,34.545
  Bottom Layer 1 w0.6: LDO1.1 65.89,53.725 66.29,53.325 C27.2 ; LDO2.1 65.907,36.725 66.307,36.325 C30.2
  other v1: 71.248,30.326 75.148,30.326 32.148,73.696 36.048,73.696
GND: C1.1 C2.1 C3.1 C4.1 C5.1 C7.1 C8.1 C9.1 C10.1 C11.1 C12.1 C13.1 C14.1 C15.1 C16.1 C17.1 C18.1 C19.1 C20.1 C21.1 C22.1 C23.1 C24.1 C25.1 C26.1 C27.1 C28.1 C29.1 C30.1 C31.1 C32.1 C33.1 C34.1 C35.1 CAN1.2 D1.3 D1.8 D1.9 D2.2 D2.4 D2.6 D2.7 D3.A1 D3.C5 D3.E1 D3.E3 D4.6 D4.7 D.6 D.S1 D.S2 HL3.2 HL4.2 LDO1.2 LDO2.2 P.6 R14.1 R17.2 R25.2 R34.1 R36.2 R37.2 TYPE-C1.A1_B12 U1.4 U2.6 U2.7 U3.9 U3.11 U4.16 U4.38 U4.51 U4.61 U4.83 U4.94 U4.107 U4.120 U4.130 XP1_1.37 XP1_1.38 XP1_1.39 XP1_1.40 XP1_2.37 XP1_2.38 XP1_2.39 XP1_2.40 XP2_1.1 XP2_1.2 XP2_1.3 XP2_1.4 XP2_1.5 XP2_1.6 XP2_1.37 XP2_1.38 XP2_1.39 XP2_1.40 XP2_2.1 XP2_2.2 XP2_2.3 XP2_2.4 XP2_2.5 XP2_2.6 XP2_2.37 XP2_2.38 XP2_2.39 XP2_2.40 XP3_1.1 XP3_1.2 XP3_1.3 XP3_1.4 XP3_1.35 XP3_1.36 XP3_1.37 XP3_1.38 XP3_1.39 XP3_1.40 XP3_2.1 XP3_2.2 XP3_2.3 XP3_2.4 XP3_2.35 XP3_2.36 XP3_2.37 XP3_2.38 XP3_2.39 XP3_2.40 XP4_1.1 XP4_1.2 XP4_1.3 XP4_1.4 XP4_2.1 XP4_2.2 XP4_2.3 XP4_2.4
  other v1: 32.148,26.516 36.048,26.516 32.148,27.786 36.048,27.786 32.148,29.056 36.048,29.056 32.148,49.376 36.048,49.376 71.248,49.376 75.148,49.376 32.148,50.646 36.048,50.646 71.248,50.646 75.148,50.646 32.148,53.376 36.048,53.376 71.248,53.376 75.148,53.376 32.148,54.646 36.048,54.646 71.248,54.646 75.148,54.646
NetC1_2: C1.2 CAN1.5 R1.2 R2.2 | length 6.4
  Top Layer 1 w0.15: CAN1.5 47.62,27.895 R2.2 R1.2 51.8,28.175 C1.2
NetC5_2: C5.2 U3.10 | length 1.6
  Top Layer 1 w0.15: C5.2 47.05,39.4 47.65,38.8 U3.10
NetC6_1: C6.1 U3.12 | length 8.3
  Top Layer 1 w0.15: U3.12 47.968,39.8 47.643,40.125 46.357,40.125 46.2,39.968 46.2,36.738 46.288,36.65 48.7,36.65 C6.1
NetC6_2: C6.2 U3.8 | length 2.4
  Top Layer 1 w0.15: U3.8 48.85,37.8 48.85,37.413 48.938,37.325 49.675,37.325 50.425,36.575 C6.2
NetC7_2: C7.2 U4.24 Y1.2 | length 4.4
  Top Layer 1 w0.15: v1(43.45,54.55) 43.572,54.55 43.882,54.86 44.615,54.86 U4.24
  Bottom Layer 1 w0.15: C7.2 44.45,52.3 Y1.2
NetC8_2: C8.2 U4.23 Y1.1 | length 4.5
  Top Layer 1 w0.15: v1@43.075,55.35 43.15,55.425 U4.23
  Bottom Layer 1 w0.15: C8.2 44.475,56.625 Y1.1
  other v1: 43.073,55.356
NetC26_2: C26.2 R18.2 U4.32 | length 7.2
  Top Layer 1 w0.15: C26.2 42.225,47.2 43.175,48.15 43.175,50.475 ; R18.2 42.412,49.312 42.412,49.712 43.175,50.475 ; U4.32 44.615,50.86 43.56,50.86 43.175,50.475
NetC34_2: C34.2 D4.5 R42.1 | length 5
  Bottom Layer 1 w0.15: R42.1 61.15,71.55 61.575,71.975 61.625,71.975 62.275,72.625 63.65,72.625 ; D4.5 63.65,72.625 ; C34.2 64.575,71.7 63.65,72.625
NetC35_2: C35.2 D4.8 | length 1.7
  Bottom Layer 1 w0.15: C35.2 61.725,73.6 61.875,73.45 D4.8
NetCAN1_1: CAN1.1 U4.74 | length 45.7
  Top Layer 1 w0.15: CAN1.1 41.335,31.705 41.527,31.897 41.527,32.202 43.425,34.1 54.35,34.1 55.025,34.775 55.025,37.882 55.288,38.144 55.288,40.688 56.1,41.5 63.812,41.5 63.9,41.588 63.9,44.3 64.1,44.5 66.618,44.5 66.668,44.55 67.337,44.55 67.425,44.638 67.425,48.125 67.3,48.25 65,48.25 64.725,48.525 64.725,49.337 64.813,49.425 U4.74
NetCAN1_4: CAN1.4 U4.73 | length 49.1
  Top Layer 1 w0.15: CAN1.4 42.52,27.895 43,28.375 43,33.125 43.35,33.475 55.425,33.475 55.775,33.825 55.775,40.225 56.125,40.575 64.475,40.575 64.625,40.725 64.625,43.987 64.713,44.075 67.837,44.075 67.925,44.163 67.925,48.737 67.737,48.925 U4.73
NetCAN1_6: CAN1.6 R2.1 XP2_1.26 XP2_2.26 | length 70.5
  Top Layer 1 w0.15: CAN1.6 47.24,29.165 R2.1@47.9,29.825 ; R2.1 R2.1@47.9,29.825 ; XP2_1.26 77.44,62.26 77.625,62.075 77.625,32.175 77.6,32.2 69.45,32.2 69.35,32.1 69.35,30.975 69,30.625 69,27.788 68.912,27.7 56.825,27.7 55.625,28.9 51.407,28.9 51.082,29.225 50.875,29.225 50.75,29.1 49.257,29.1 48.957,29.4 48.325,29.4 R2.1@47.9,29.825
  other v1: 75.148,62.266
NetCAN1_7: CAN1.7 R1.1 XP2_1.24 XP2_2.24 | length 92.8
  Top Layer 1 w0.15: CAN1.7 47.092,30.435 47.307,30.65 49.125,30.65 R1.1@49.85,29.925 ; R1.1 R1.1@49.85,29.925 ; XP2_1.24 74.705,63.475 78.012,63.475 78.1,63.387 78.1,31 78.025,30.925 69.75,30.925 69.4,30.575 69.4,27.03 44.105,27.03 44.012,26.937 43.888,26.937 43.725,27.1 43.725,32.462 43.813,32.55 49.5,32.55 49.85,32.2 R1.1@49.85,29.925
  other v1: 75.148,63.536
NetD1_2: D1.2 R8.2 | length 2.7
  Bottom Layer 1 w0.15: R8.2 40.625,73.325 40.625,72.915 41.775,71.765 D1.2
NetD1_4: D1.4 R9.2 | length 1.7
  Bottom Layer 1 w0.15: R9.2 42.075,73.725 42.54,73.26 D1.4
NetD1_5: D1.5 R10.2 | length 1.9
  Bottom Layer 1 w0.15: D1.5 43.04,72.28 43.525,72.765 43.525,73.35 R10.2
NetD1_6: D1.6 U4.49 | length 30.4
  Top Layer 1 w0.15: v1@44.225,71.75 44.5,71.75 46.075,70.175 46.075,66.249 49.749,62.575 52.512,62.575 53.148,61.94 53.148,49.094 52.675,48.622 52.675,48.458 52.6,48.383 U4.49
  other v1: 44.223,71.756
NetD1_7: D1.7 U4.125 | length 19.9
  Top Layer 1 w0.15: U4.125 56.1,67.371 56.6,66.871 56.6,65.529 v1(56.598,65.531)
  Bottom Layer 1 w0.15: D1.7 43.987,71.25 47.089,68.148 56.034,68.148 56.598,67.584 v1(56.598,65.531)
NetD2_1: D2.1 U4.92 | length 3.1
  Top Layer 1 w0.15: U4.92 67.033,58.425 67.758,57.7 v1@68.85,57.7
  other v1: 68.848,57.706
NetD2_5: D2.5 U4.50 | length 1.4
  Top Layer 1 w0.15: U4.50 53.148,47.053 53.148,48.353 v1(53.197,48.401)
NetD2_8: D2.8 R11.2 | length 2.9
  Bottom Layer 1 w0.15: R11.2 77.3,41.4 77.75,41.85 D2.8
NetD2_9: D2.9 R13.2 | length 2.1
  Bottom Layer 1 w0.15: D2.9 78.165,42.46 78.482,42.143 78.532,42.143 79.275,41.4 R13.2
NetD2_10: D2.10 D2.15 R12.1 | length 1.6
  Bottom Layer 1 w0.15: D2.15 81.165,41.56 R12.1
NetD2_12: D2.12 U4.91 | length 3.3
  Top Layer 1 w0.15: U4.91 67.108,57.925 68.133,56.9 v1@68.85,56.9
  other v1: 68.848,56.906
NetD2_13: D2.13 U4.90 | length 3.3
  Top Layer 1 w0.15: U4.90 67,57.425 68.05,56.375 68.65,56.375 68.825,56.2 68.825,56.204 v1(68.823,56.206)
NetD2_14: D2.14 U4.53 | length 1.6
  Top Layer 1 w0.15: v1@54.425,48.575 54.6,48.4 U4.53
  other v1: 54.423,48.581
NetD2_16: D2.16 U4.93 | length 3
  Top Layer 1 w0.15: U4.93 66.98,58.925 67.075,58.83 67.075,58.807 67.232,58.65 68.298,58.65 68.323,58.675 68.816,58.675 v1(68.898,58.756)
NetD3_A3: D3.A3 R22.2 | length 1.9
  Bottom Layer 1 w0.15: R22.2 50.65,63.337 50.95,63.037 50.95,62.7 50.887,62.637 D3.A3@50.887,62.467
NetD3_A5: D3.A5 U4.55 | length 1.6
  Top Layer 1 w0.15: U4.55 55.6,47.6 55.735,47.735 55.735,47.813 56.222,48.3 v1@56.275,48.3
  other v1: 56.273,48.306
NetD3_B4: D3.B4 R23.2 | length 3
  Bottom Layer 1 w0.13: D3.B4 50.581,62.628
  Bottom Layer 1 w0.15: R23.2 48.75,64.175 49.733,63.192 50.023,63.192 50.58,62.635 50.587,62.628
NetD3_C1: D3.C1 R24.1 | length 2.2
  Bottom Layer 1 w0.15: D3.C1 53.242,61.892 R24.1
NetD3_D2: D3.D2 U4.89 | length 1.5
  Top Layer 1 w0.15: U4.89 66.085,56.86 66.815,56.86 v1@67.3,56.375
  other v1: 67.298,56.381
NetD4_1: D4.1 R41.2 | length 2.6
  Bottom Layer 1 w0.15: D4.1 65.275,74.95 66.375,73.85 R41.2
NetD4_4: D4.4 U4.88 | length 1.2
  Top Layer 1 w0.15: v1@64.8,56.4 64.825,56.425 U4.88
  other v1: 64.798,56.406
NetD4_9: D4.9 U4.132 | length 2.9
  Top Layer 1 w0.15: U4.132 52.6,67.305 53.123,66.783 53.123,65.756 v1(53.073,65.706)
NetD4_12: D4.12 R38.1 U4.22 | length 8.1
  Top Layer 1 w0.15: U4.22 50.025,55.925 v1@50.05,55.9
  Bottom Layer 1 w0.15: R38.1 62.3,75.575 62.65,75.225 D4.12
  other v1: 50.048,55.906
NetD4_13: D4.13 R39.2 | length 1.8
  Bottom Layer 1 w0.15: R39.2 62.45,76.575 63.15,75.875 D4.13
NetD4_14: D4.14 R40.2 | length 3.2
  Bottom Layer 1 w0.15: D4.14 63.65,75.225 64.25,75.825 R40.2
NetD_1: D.1 R31.2 U4.101 | length 11
  Top Layer 1 w0.15: v1(58.523,59.481) 58.523,59.477 58.525,59.475 61.975,62.925 U4.101
  Bottom Layer 1 w0.15: R31.2 40.95,42.1 D.1
NetD_2: D.2 R32.2 | length 2.4
  Bottom Layer 1 w0.15: D.2 42.05,41.475 42.75,42.175 R32.2
NetD_3: D.3 U4.42 | length 8.9
  Top Layer 1 w0.15: v1(43.725,41.725) 45.025,43.025 47.443,43.025 49.1,44.682 U4.42
NetD_5: D.5 U4.48 | length 8.7
  Top Layer 1 w0.15: v1@46.075,41.525 47.293,41.525 51.965,46.197 51.965,46.275 52.1,46.41 U4.48
  other v1: 46.073,41.531
NetD_7: D.7 R29.2 U4.98 | length 8.2
  Top Layer 1 w0.15: v1@60.8,59.725 62.5,61.425 U4.98
  Bottom Layer 1 w0.15: D.7 47.55,41.375 48.25,42.075 R29.2
  other v1: 60.798,59.731
NetD_8: D.8 R30.2 U4.100 | length 10.2
  Top Layer 1 w0.15: v1@59.675,59.6 62.5,62.425 U4.100
  Bottom Layer 1 w0.15: D.8 48.65,40.575 49.775,41.7 49.8,41.7 50.225,42.125 R30.2
  other v1: 59.673,59.606
NetHL1_1: HL1.1 R26.1 | length 2.9
  Top Layer 1 w0.15: R26.1 28.525,58.125 28.95,58.55 28.95,58.925 HL1.1
NetHL1_2: HL1.2 U4.8 | length 28
  Top Layer 1 w0.15: HL1.2 27.1,61.175 27.1,66.737 27.188,66.825 30.668,66.825 31.275,66.218 31.275,63.362 31.557,63.08 37.643,63.08 37.838,63.275 43.657,63.275 43.872,63.06 43.95,63.06 44.085,62.925 U4.8
NetHL2_1: HL2.1 R27.1 | length 2.9
  Top Layer 1 w0.15: R27.1 28.5,63.775 28.925,64.2 28.925,64.65 HL2.1
NetHL2_2: HL2.2 U4.9 | length 21.4
  Top Layer 1 w0.15: HL2.2 27.675,65.6 27.675,63.182 28.307,62.55 30.85,62.55 31.05,62.75 40.35,62.75 40.775,62.325 40.775,61.7 42.693,61.7 42.825,61.832 42.825,61.961 43.154,62.29 43.95,62.29 44.085,62.425 U4.9
NetHL3_1: HL3.1 R33.1 | length 2.9
  Top Layer 1 w0.15: R33.1 28.45,69.25 29.75,70.55 29.75,70.875 HL3.1
NetHL4_1: HL4.1 R35.1 | length 2.7
  Top Layer 1 w0.15: R35.1 28.525,74.775 28.95,75.2 28.95,75.575 HL4.1
NetP_2: P.2 R19.1 | length 8.1
  Bottom Layer 1 w0.15: R19.1 77.15,72.05 78.975,70.225 78.975,68.738 78.887,68.65 77.7,68.65 P.2
NetP_3: P.3 R20.1 U4.110 XP1_1.31 XP1_2.31 | length 48.8
  Top Layer 1 w0.15: v1@57.9,63.425 59.353,63.425 63.465,67.537 63.465,67.615 63.6,67.75 U4.110
  Bottom Layer 1 w0.15: v1(57.898,63.431) 57.975,63.509 57.975,63.875 57.948,63.902 57.948,66.307 58.448,66.807 58.448,67.771 59.367,68.69 65.107,68.69 68.099,71.681 72.031,71.681 72.25,71.9 72.25,74.473 74.457,76.68 75.843,76.68 75.848,76.675 R20.1 77.2,76.675 77.625,76.25 77.625,76.2 78.05,75.775 78.05,71.775 79.575,70.25 79.575,67.538 79.487,67.45 P.3
  other v1: 32.148,58.456
NetP_4: P.4 R21.1 U4.105 | length 42.6
  Top Layer 1 w0.15: U4.105 69.082,64.925 69.777,64.23 78.537,64.23 78.625,64.142 78.625,53.479 79.025,53.079 v1@79.025,53.075
  Bottom Layer 1 w0.15: P.4 77.7,66.25 79.687,66.25 80.025,65.912 80.025,61.633 77.9,59.508 77.9,55.957 77.475,55.532 77.475,54.95 77.05,54.525 R21.1 77,53.463 77.381,53.081 v1(79.023,53.081)
NetP_5: P.5 R25.1 U4.109 | length 49
  Top Layer 1 w0.15: U4.109 66.327,68.345 67.132,69.15 75.653,69.15 78.925,65.878 78.925,56.875 v1(80.375,55.425)
  Bottom Layer 1 w0.15: P.5 78.05,64.95 78.675,64.325 78.675,60.707 76.975,59.007 R25.1 76.875,56.5 76.163,56.5 76.075,56.412 76.075,52.875 76.45,52.5 79.812,52.5 79.9,52.588 79.9,54.95 v1(80.375,55.425)
NetP_7: P.7 R5.2 R8.1 R11.1 R22.1 R39.1 U4.133 XP1_1.29 XP1_2.29 | length 78.9
  Top Layer 1 w0.15: U4.133 52.1,67.381 52.6,66.881 52.6,66.504 v1(52.598,66.506) ; v1(63.375,77.475) 66.275,77.475 66.363,77.387 66.363,76.663 R5.2
  Top Layer w0.15: v1(40.198,76.856) 47.254,69.8 50.825,69.8 52.598,68.027 v1(52.598,66.506)
  Bottom Layer 1 w0.15: v1@40.1,76.95 40.2,76.85 R8.1 ; R22.1 50.65,65.85 51.075,65.425 51.586,65.425 51.729,65.281 52.24,65.281 52.394,65.435 ; v1@50.75,69.8 53.125,72.175 53.125,76.625 53.975,77.475 v1(63.375,77.475) 63.461,77.389 63.461,77.164 64.05,76.575 R39.1 ; v1(52.598,66.506) 52.548,66.456 52.548,65.589 52.394,65.435 ; P.7 76.103,62.45 75.762,62.791 70.365,62.791 66.53,58.956 57.125,58.956 54.325,61.757 54.325,62.932 53.7,63.557 53.7,64.593 53.279,65.014 52.815,65.014 52.394,65.435
  other v1: 32.148,59.726 50.748,69.806
NetP_8: P.8 U4.25 | length 35.8
  Top Layer 1 w0.15: U4.25 46.249,54.425 46.549,54.725 v1@52.025,54.725
  Bottom Layer 1 w0.15: v1(52.023,54.731) 55.523,58.231 69.115,58.231 69.865,58.981 71.655,58.981 72.925,60.251 75.555,60.251 76.503,61.2 P.8
NetR3_1: R3.1 U2.1 | length 2
  Top Layer 1 w0.15: U2.1 62.925,73.55 63.575,72.9 R3.1
NetR3_2: R3.2 R10.1 R12.2 R24.2 R41.1 U4.134 XP1_1.25 XP1_2.25 | length 58.1
  Top Layer 1 w0.15: U4.134 51.665,68.28 51.665,67.392 52.073,66.984 52.073,65.848 v1@52.025,65.8 ; R3.2 67.775,72.9 v1@67.925,72.75
  Top Layer w0.15: v1(43.923,76.581) 42.48,76.581 41.411,77.65 40.671,77.65 40.64,77.681 39.856,77.681 39.25,77.076 39.25,74.85 45.015,69.085 45.015,68.121 47.505,65.631 49.615,65.631 49.79,65.806 v1(52.023,65.806)
  Bottom Layer 1 w0.15: v1@43.925,76.575 43.95,76.55 R10.1 ; v1(52.023,65.806) 52.073,65.856 52.073,66.724 52.38,67.031 52.815,67.031 53.303,66.544 53.303,66.219 53.95,65.571 54.422,65.571 55.25,64.743 55.25,63.85 ; R24.2 55.25,63.557 55.25,63.85 ; R41.1 68.125,73.081 67.923,72.878 v1(67.923,72.756) 66.502,71.336 66.502,70.509 64.983,68.99 59.243,68.99 58.148,67.895 58.148,66.931 57.648,66.431 57.648,64.764 56.575,63.691 55.409,63.691 55.25,63.85
  other v1: 32.148,62.225
NetR4_1: R4.1 U2.14 | length 1.7
  Top Layer 1 w0.15: U2.14 63.662,74.3 63.687,74.325 64.15,74.325 R4.1
NetR4_2: R4.2 R9.1 R13.1 R23.1 R40.1 U4.135 XP1_1.27 XP1_2.27 | length 30.6
  Top Layer 1 w0.15: U4.135 51.165,68.28 51.165,67.58 51.365,67.38 51.365,67.267 51.55,67.082 v1@51.55,66.381 ; R4.2 68.769,74.75 68.951,74.931 v1(69.073,74.931)
  Top Layer w0.15: v1(41.955,76.364) 41.869,76.45 41.447,76.45 40.515,77.381 39.98,77.381 39.55,76.951 39.55,75.686 46.276,68.96 46.336,68.96 48.915,66.381 v1(51.548,66.381)
  Bottom Layer 1 w0.15: v1(41.955,76.364) 41.955,75.595 R9.1 ; R23.1 48.75,65.975 49.175,66.4 49.782,66.4 50.057,66.675 v1@51.548,66.675 ; R40.1 68.25,75.825 69.075,75 v1@69.075,74.85
  other v1: 32.148,60.996
NetR5_1: R5.1 U2.13 | length 2.8
  Top Layer 1 w0.15: U2.13 63.587,74.8 63.675,74.888 63.675,75.263 64.125,75.712 64.125,76.175 64.55,76.6 R5.1
NetR6_1: R6.1 U3.16 U4.10 XP3_1.9 XP3_2.9 | length 2.9
  Top Layer 1 w0.15: v1(42.75,60.675) 42.75,61.297 43.125,61.672 43.125,61.837 43.213,61.925 U4.10
  other v1: 32.148,45.566
NetR7_1: R7.1 U3.1 U4.11 XP3_1.11 XP3_2.11 | length 4.7
  Top Layer 1 w0.15: v1(43.375,59.875) 43.325,59.925 43.325,61.125 43.625,61.425 U4.11 ; U3.1 51.95,39.8 52.55,40.4 R7.1
  other v1: 32.148,44.296
NetR14_2: R14.2 TYPE-C1.A5 | length 6
  Top Layer 1 w0.15: R14.2 57.225,36.075 57.65,35.65 57.7,35.65 58.28,35.07 60.529,35.07 60.612,34.987 61.2,34.399 61.439,34.399 61.7,34.138 61.7,33.6 TYPE-C1.A5
NetR15_1: R15.1 TYPE-C1.A6 TYPE-C1.B6 | length 20.8
  Top Layer 1 w0.15: v1(57.35,35.05) 56.438,35.05 56.35,35.138 56.35,36.887 56.438,36.975 59.062,36.975 59.15,36.887 59.15,36.25 59.275,36.125 59.7,36.55 60.332,36.55 60.795,37.013 61.805,37.013 62.287,36.531 62.287,35.744 63.775,34.257 TYPE-C1.B6 ; TYPE-C1.A6 62.787,33.513 62.787,32.463 v1(62.8,32.45)
  Bottom Layer 1 w0.15: v1(57.35,35.05) v1(62.8,32.45)
NetR15_2: R15.2 U4.104 | length 8.1
  Top Layer 1 w0.15: v1@58.75,62.375 60.8,64.425 U4.104
  other v1: 58.748,62.381
NetR16_1: R16.1 TYPE-C1.A7 TYPE-C1.B7 | length 5.9
  Top Layer 1 w0.15: R16.1 61.438,36.012 61.438,35.2 ; TYPE-C1.B7 62.2,33.6 62.2,34.138 61.438,34.9 61.438,35.2 ; TYPE-C1.A7 63.2,33.6 63.2,34.058 63.15,34.108 63.15,34.188 63.018,34.32 62.905,34.32 62.025,35.2 61.438,35.2
NetR16_2: R16.2 U4.103 | length 8.5
  Top Layer 1 w0.15: v1@58.725,61.025 61.625,63.925 U4.103
  other v1: 58.723,61.031
NetR17_1: R17.1 TYPE-C1.B5 | length 3.2
  Top Layer 1 w0.15: R17.1 63.275,36.075 64.775,34.575 TYPE-C1.B5
NetR28_1: R28.1 R34.2 U4.34 | length 9.7
  Top Layer 1 w0.15: R28.1 42.275,45.35 42.7,45.775 42.7,45.825 43.3,46.425 ; R34.2 42.325,43.45 42.75,43.875 42.75,44.45 43.375,45.075 43.375,46.35 43.3,46.425 ; U4.34 43.688,49.925 43.6,49.837 43.6,46.725 43.3,46.425
NetR36_1: R36.1 U4.138 XP2_1.20 XP2_2.20 | length 6.3
  Top Layer 1 w0.15: U4.138 49.6,72.062 49.688,72.15 R36.1
  other v1: 75.148,66.076
NetR37_1: R37.1 U4.31 XP3_1.32 XP3_2.32 | length 2.7
  Top Layer 1 w0.15: R37.1 42.95,50.95 43.425,51.425 U4.31
  other v1: 36.048,31.596
NetTYPE-C1_2: 
NetU1_1: U1.1 U4.123 | length 21.9
  Top Layer 1 w0.15: U1.1 40.375,75.955 41.52,77.1 v1@42.5,77.1 ; v1@57.025,69.7 57.1,69.625 U4.123
  Top Layer w0.15: v1(42.698,77.106) 49.623,77.106 v1(57.023,69.706)
NetU1_2: U1.2 U4.86 | length 37.3
  Top Layer 1 w0.15: v1@38.4,74.675 38.41,74.685 U1.2 ; v1@64.325,55.425 U4.86
  Top Layer w0.15: v1(38.398,74.681) 44.715,68.364 44.715,67.997 53.756,58.956 60.798,58.956 v1(64.323,55.431)
NetU1_3: U1.3 U4.114 | length 27.3
  Top Layer 1 w0.15: U1.3 39.953,73.337 40.862,73.337 42.735,75.21 51.553,75.21 51.818,75.475 55.125,75.475 57.125,73.475 59.3,73.475 61.675,71.1 61.675,69.15 61.665,69.14 61.665,68.41 U4.114
NetU1_5: U1.5 U4.85 | length 33.6
  Top Layer 1 w0.15: U1.5 47.575,72.145 48.225,71.495 v1@48.225,71.15 ; v1@63.625,54.95 63.669,54.906 64.54,54.906 64.559,54.925 U4.85
  Top Layer w0.15: v1(48.223,71.156) 54.34,71.156 65.95,59.546 65.95,55.038 65.819,54.906 64.105,54.906 64.061,54.95 63.629,54.95 v1(63.623,54.956)
NetU1_6: U1.6 U4.117 | length 16.5
  Top Layer 1 w0.15: U1.6 54.885,73.415 56.275,72.025 58.708,72.025 59.6,71.133 59.6,69.707 59.851,69.456 59.949,69.456 60.1,69.305 U4.117
NetU1_7: U1.7 U4.115 | length 18.3
  Top Layer 1 w0.15: U1.7 54.815,74.685 56.85,72.65 59.393,72.65 61.25,70.793 61.25,69.607 61.1,69.457 U4.115
NetU2_4: U2.4 U4.127 | length 1.8
  Top Layer 1 w0.15: U4.127 55.1,67.2 v1@55.575,66.725
  other v1: 55.573,66.731
NetU2_9: U2.9 U4.126 | length 2.5
  Top Layer 1 w0.15: U4.126 55.661,68.284 55.661,67.385 56.098,66.949 56.098,66.223 v1@55.95,66.075
  other v1: 55.948,66.081
NetU2_12: U2.12 U4.54 | length 1.6
  Top Layer 1 w0.15: U4.54 55.1,48.35 v1@55.25,48.5
  other v1: 55.248,48.506
NetU4_1: U4.1 XP3_1.10 XP3_2.10 | length 27.1
  Top Layer 1 w0.15: XP3_1.10 37.325,45.56 37.475,45.71 37.475,46.212 38.073,46.809 v1(38.073,62.106) ; v1@38.075,63.875 40.625,66.425 U4.1
  Bottom Layer 1 w0.15: v1(38.073,63.881) v1(38.073,62.106) 38.073,62.102 v1@38.075,62.1
  other v1: 36.048,45.566
NetU4_2: U4.2 XP3_1.12 XP3_2.12 | length 27.6
  Top Layer 1 w0.15: XP3_1.12 37.325,44.29 37.475,44.44 37.475,44.942 38.85,46.317 v1(38.85,62.075) ; v1@38.9,63.875 40.95,65.925 U4.2
  Bottom Layer 1 w0.15: v1(38.85,62.075) 38.874,62.099 38.874,63.858 v1(38.898,63.881)
  other v1: 36.048,44.296
NetU4_3: U4.3 XP3_1.14 XP3_2.14 | length 29.3
  Top Layer 1 w0.15: v1(36.048,43.026) 36.099,42.975 38.4,42.975 39.7,44.275 39.7,61.85 v1(39.75,61.9) ; v1@39.725,63.675 41.475,65.425 U4.3
  Bottom Layer 1 w0.15: v1(39.723,63.681) 39.736,63.668 39.736,61.914 v1(39.75,61.9)
NetU4_4: U4.4 XP4_1.5 XP4_2.5 | length 10.6
  Top Layer 1 w0.15: U4.4 45.775,64.925 v1@52.525,58.175
  other v1: 71.248,48.106 52.523,58.181
NetU4_5: U4.5 XP4_1.7 XP4_2.7 | length 10.4
  Top Layer 1 w0.15: U4.5 45.275,64.425 45.41,64.29 45.488,64.29 51.95,57.828 v1@51.95,57.4
  other v1: 71.295,46.891 51.948,57.406
NetU4_14: U4.14 XP4_1.15 XP4_2.15 | length 12.6
  Top Layer 1 w0.15: U4.14 47.996,59.925 52.848,55.073 52.848,53.224 52.511,52.887 v1(52.511,52.818)
  other v1: 71.248,41.756
NetU4_15: U4.15 XP4_1.17 XP4_2.17 | length 12.9
  Top Layer 1 w0.15: U4.15 48.071,59.425 52.548,54.949 52.548,53.598 v1(51.225,52.275)
  other v1: 71.248,40.486
NetU4_26: U4.26 XP3_1.24 XP3_2.24 | length 1.8
  Top Layer 1 w0.15: U4.26 v1@46.5,53.925
  other v1: 36.048,36.676 46.498,53.931
NetU4_27: U4.27 XP3_1.26 XP3_2.26 | length 2.6
  Top Layer 1 w0.15: U4.27 v1@47.325,53.425
  other v1: 36.048,35.406 47.323,53.431
NetU4_28: U4.28 XP3_1.28 XP3_2.28 | length 3.5
  Top Layer 1 w0.15: U4.28 44.705,52.95 48.125,52.95 v1(48.15,52.975)
  other v1: 36.132,34.148
NetU4_29: U4.29 XP3_1.30 XP3_2.30 | length 4.3
  Top Layer 1 w0.15: U4.29 44.693,52.413 48.962,52.413 v1(48.975,52.4)
  other v1: 36.048,32.866
NetU4_35: U4.35 XP2_1.25 XP2_2.25 | length 1.7
  Top Layer 1 w0.15: U4.35 46.375,49.425 v1@46.4,49.45
  other v1: 46.398,49.456 71.248,62.266
NetU4_36: U4.36 XP1_1.19 XP1_2.19
  other v1: 32.148,66.076
NetU4_37: U4.37 XP1_1.17 XP1_2.17 | length 0.7
  Top Layer 1 w0.15: v1@45.9,47.125 46.02,47.005 U4.37
  other v1: 45.898,47.131 32.148,67.346
NetU4_40: U4.40 XP1_1.33 XP1_2.33 | length 1.9
  Top Layer 1 w0.15: U4.40 48.1,48.875 v1@48.15,48.925
  other v1: 48.148,48.931 32.148,57.186
NetU4_41: U4.41 XP2_1.17 XP2_2.17 | length 1.5
  Top Layer 1 w0.15: U4.41 48.6,48.2 48.825,48.425 48.825,48.429 v1(48.823,48.431)
  other v1: 71.248,67.346
NetU4_43: U4.43 XP2_1.27 XP2_2.27 | length 7.1
  Top Layer 1 w0.15: U4.43 49.6,49.625 50.325,50.35 51.875,50.35 51.925,50.3 52.25,49.975 52.25,49.108 52.236,49.094 52.236,48.761 v1(52.15,48.675)
  other v1: 71.248,60.996
NetU4_45: U4.45 XP4_1.14 XP4_2.14 | length 1.4
  Top Layer 1 w0.15: v1(50.575,48.381) 50.587,48.369 50.587,47.018 U4.45
  other v1: 75.148,43.026
NetU4_46: U4.46 XP2_1.19 XP2_2.19 | length 2.8
  Top Layer 1 w0.15: v1(51.05,49.825) 51.1,49.775 U4.46
  other v1: 71.248,66.076
NetU4_47: U4.47 XP2_1.21 XP2_2.21 | length 2.4
  Top Layer 1 w0.15: U4.47 51.6,49.078 51.725,49.203 v1(51.725,49.325)
  other v1: 71.248,64.806
NetU4_58: U4.58 XP4_1.9 XP4_2.9 | length 1.6
  Top Layer 1 w0.15: U4.58 57.1,48.2 v1@57.375,48.475
  other v1: 71.305,45.535 57.373,48.481
NetU4_60: U4.60 XP2_1.7 XP2_2.7 | length 2.1
  Top Layer 1 w0.15: U4.60 58.1,48.175 v1@58.775,48.85
  other v1: 58.773,48.856 71.248,73.696
NetU4_64: U4.64 XP2_1.9 XP2_2.9 | length 9.7
  Top Layer 1 w0.15: U4.64 60.1,53.975 61.35,55.225 v1@62.325,55.225
  other v1: 62.323,55.231 71.248,72.426
NetU4_66: U4.66 XP2_1.11 XP2_2.11 | length 8.4
  Top Layer 1 w0.15: U4.66 61.1,52.901 61.805,53.606 62.569,53.606 v1@63.125,53.05
  other v1: 63.123,53.056 71.248,71.156
NetU4_67: U4.67 XP2_1.13 XP2_2.13 | length 6.2
  Top Layer 1 w0.15: U4.67 61.6,52.65 v1@62.025,53.075
  other v1: 62.023,53.081 71.248,69.886
NetU4_69: U4.69 XP4_1.12 XP4_2.12 | length 5.1
  Top Layer 1 w0.15: v1@62.35,52.05 62.6,51.8 U4.69
  other v1: 75.148,44.296 62.348,52.056
NetU4_70: U4.70 XP4_1.10 XP4_2.10 | length 5.2
  Top Layer 1 w0.15: U4.70 63.1,52.025 v1@63.225,52.15
  other v1: 75.148,45.566 63.223,52.156
NetU4_75: U4.75 XP4_1.16 XP4_2.16 | length 18.6
  Top Layer 1 w0.15: U4.75 68.492,49.925 69.892,51.325 72.475,51.325 72.75,51.05 72.75,41.838 72.838,41.75 XP4_1.16
  other v1: 75.148,41.756
NetU4_81: U4.81 XP2_1.29 XP2_2.29 | length 14.4
  Top Layer 1 w0.15: U4.81 67.007,52.925 67.307,52.625 68.493,52.625 69.217,53.349 69.217,54.651 69.942,55.375 72.587,55.375 72.675,55.463 72.675,59.675 72.587,59.763 72.149,59.763 72.113,59.726 v1(71.248,59.726)
NetU4_82: U4.82 XP2_1.31 XP2_2.31 | length 8.4
  Top Layer 1 w0.15: U4.82 66.615,53.425 66.75,53.56 66.828,53.56 67.067,53.8 67.067,53.935 67.414,54.282 68.45,54.282 68.911,54.743 68.911,54.769 69.373,55.23 69.373,57.848 69.975,58.45 XP2_1.31
  other v1: 71.248,58.456
NetU4_99: U4.99 XP2_1.23 XP2_2.23 | length 5.9
  Top Layer 1 w0.15: U4.99 67.207,61.925 68.662,63.38 71.071,63.38 v1(71.225,63.534)
NetU4_111: U4.111 XP3_1.23 XP3_2.23 | length 6.7
  Top Layer 1 w0.15: v1(58.473,64.356) 58.479,64.35 59.778,64.35 62.965,67.537 62.965,67.615 63.1,67.75 U4.111
  other v1: 32.148,36.676
NetU4_112: U4.112 XP3_1.25 XP3_2.25 | length 5.8
  Top Layer 1 w0.15: v1(58.473,65.362) 58.486,65.375 60.303,65.375 62.465,67.537 62.465,67.615 62.6,67.75 U4.112
  other v1: 32.148,35.406
NetU4_113: U4.113 XP2_1.30 XP2_2.30 | length 4.9
  Top Layer 1 w0.15: v1(58.495,66.111) 60.539,66.111 61.965,67.537 61.965,67.615 62.1,67.75 U4.113
  other v1: 75.148,59.726
NetU4_116: U4.116 XP2_1.28 XP2_2.28 | length 3.9
  Top Layer 1 w0.15: v1(57.614,67.14) 57.629,67.125 60.053,67.125 60.465,67.537 60.465,67.615 60.6,67.75 U4.116
  other v1: 75.148,60.996
NetU4_124: U4.124 XP1_1.34 XP1_2.34 XP4_1.22 XP4_2.22 | length 3.6
  Top Layer 1 w0.15: U4.124 56.6,67.295 57.125,66.77 v1@57.125,64.975
  other v1: 75.148,37.946 36.048,57.186 57.123,64.981
NetU4_129: U4.129 XP1_1.36 XP1_2.36 XP4_1.24 XP4_2.24 | length 1.9
  Top Layer 1 w0.15: U4.129 54.1,67.225 v1@54.65,66.675
  other v1: 75.148,36.676 36.048,55.916 54.648,66.681
NetU4_136: U4.136 XP3_1.29 XP3_2.29 | length 1.2
  Top Layer 1 w0.15: U4.136 50.665,68.28 50.665,67.459 50.802,67.322 v1(50.802,67.2)
  other v1: 32.148,32.866
NetU4_137: U4.137 XP3_1.27 XP3_2.27 | length 1.2
  Top Layer 1 w0.15: v1(49.991,67.196) 50.046,67.25 50.046,68.291 U4.137
  other v1: 32.148,34.136
NetU4_139: U4.139 XP2_1.15 XP2_2.15 | length 1.3
  Top Layer 1 w0.15: v1(49.025,67.075) 49.062,67.112 49.062,68.308 U4.139
  other v1: 71.248,68.616
NetU4_141: U4.141 XP3_1.6 XP3_2.6 | length 2.4
  Top Layer 1 w0.15: v1@47.725,66.15 48.1,66.525 U4.141
  other v1: 36.048,48.106 47.723,66.156
NetU4_142: U4.142 XP3_1.8 XP3_2.8 | length 1.4
  Top Layer 1 w0.15: v1@47.575,66.975 47.6,67 U4.142
  other v1: 36.048,46.836 47.573,66.981
VCC: XP1_1.1 XP1_1.2 XP1_1.3 XP1_1.4 XP1_1.5 XP1_1.6 XP1_2.1 XP1_2.2 XP1_2.3 XP1_2.4 XP1_2.5 XP1_2.6 XP4_1.35 XP4_1.36 XP4_1.37 XP4_1.38 XP4_1.39 XP4_1.40 XP4_2.35 XP4_2.36 XP4_2.37 XP4_2.38 XP4_2.39 XP4_2.40
pads on no net: CAN1.8 D3.D4 D4.2 D4.3 D4.10 D4.11 D.9 D.CD P.S TYPE-C1. TYPE-C1.A8 TYPE-C1.B1_A12 TYPE-C1.B8 TYPE-C1.S1 TYPE-C1.S2 TYPE-C1.S3 TYPE-C1.S4 U2.2 U2.3 U2.10 U2.11 U3.3 U3.5 U3.6 U3.7 U3.14 U3.15 U4.7 U4.12 U4.13 U4.18 U4.19 U4.20 U4.21 U4.44 U4.56 U4.57 U4.59 U4.63 U4.65 U4.68 U4.71 U4.76 U4.77 U4.78 U4.79 U4.80 U4.87 U4.96 U4.97 U4.102 U4.106 U4.118 U4.119 U4.122 U4.128 U4.140 U4.143 XP1_1.15 XP1_1.16 XP1_1.18 XP1_1.20 XP1_1.21 XP1_1.22 XP1_1.23 XP1_1.24 XP1_1.26 XP1_1.28 XP1_1.30 XP1_1.32 XP1_1.35 XP1_2.15 XP1_2.16 XP1_2.18 XP1_2.20 XP1_2.21 XP1_2.22 XP1_2.23 XP1_2.24 XP1_2.26 XP1_2.28 XP1_2.30 XP1_2.32 XP1_2.35 XP2_1.8 XP2_1.10 XP2_1.12 XP2_1.14 XP2_1.16 XP2_1.18 XP2_1.22 XP2_1.32 XP2_1.33 XP2_1.34 XP2_1.35 XP2_1.36 XP2_2.8 XP2_2.10 XP2_2.12 XP2_2.14 XP2_2.16 XP2_2.18 XP2_2.22 XP2_2.32 XP2_2.33 XP2_2.34 XP2_2.35 XP2_2.36 XP3_1.5 XP3_1.7 XP3_1.13 XP3_1.15 XP3_1.16 XP3_1.17 XP3_1.18 XP3_1.19 XP3_1.20 XP3_1.21 XP3_1.22 XP3_1.31 XP3_1.33 XP3_1.34 XP3_2.5 XP3_2.7 XP3_2.13 XP3_2.15 XP3_2.16 XP3_2.17 XP3_2.18 XP3_2.19 XP3_2.20 XP3_2.21 XP3_2.22 XP3_2.31 XP3_2.33 XP3_2.34 XP4_1.6 XP4_1.8 XP4_1.11 XP4_1.13 XP4_1.18 XP4_1.19 XP4_1.20 XP4_1.21 XP4_1.23 XP4_1.25 XP4_1.26 XP4_2.6 XP4_2.8 XP4_2.11 XP4_2.13 XP4_2.18 XP4_2.19 XP4_2.20 XP4_2.21 XP4_2.23 XP4_2.25 XP4_2.26

## Text inside footprints (layer, text, board x,y; h text height)
TYPE-C1: Mechanical 13 "PCB EDGE" at 68.225,26.875 h0.61